# EAGLE board MS5803-14BA_Breakout-Panel-v10 (EAGLE 6.6.0), part 1 of 3
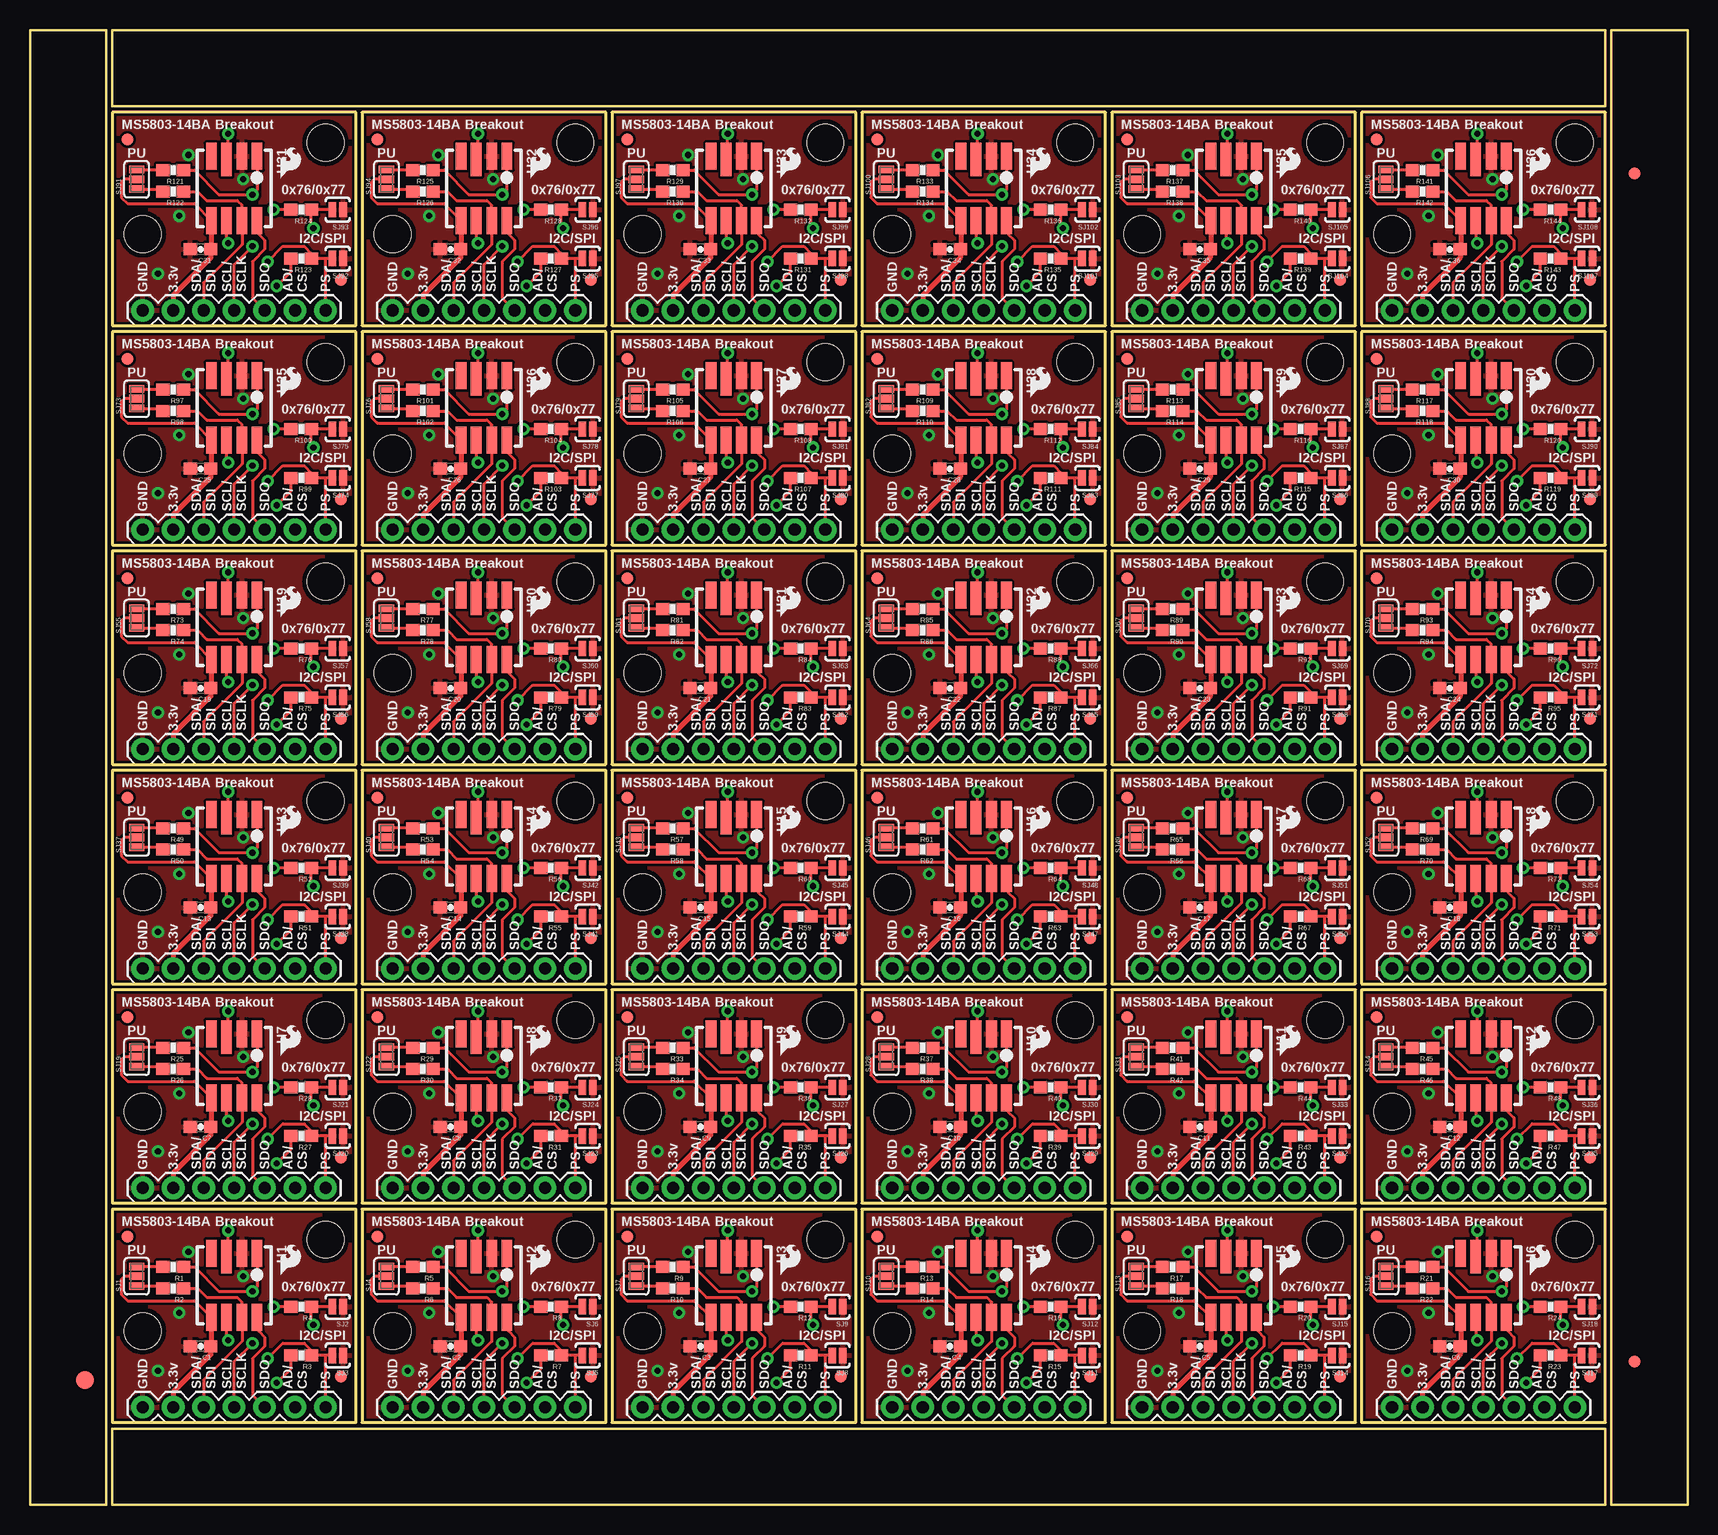
[diagram p0: board, top side]
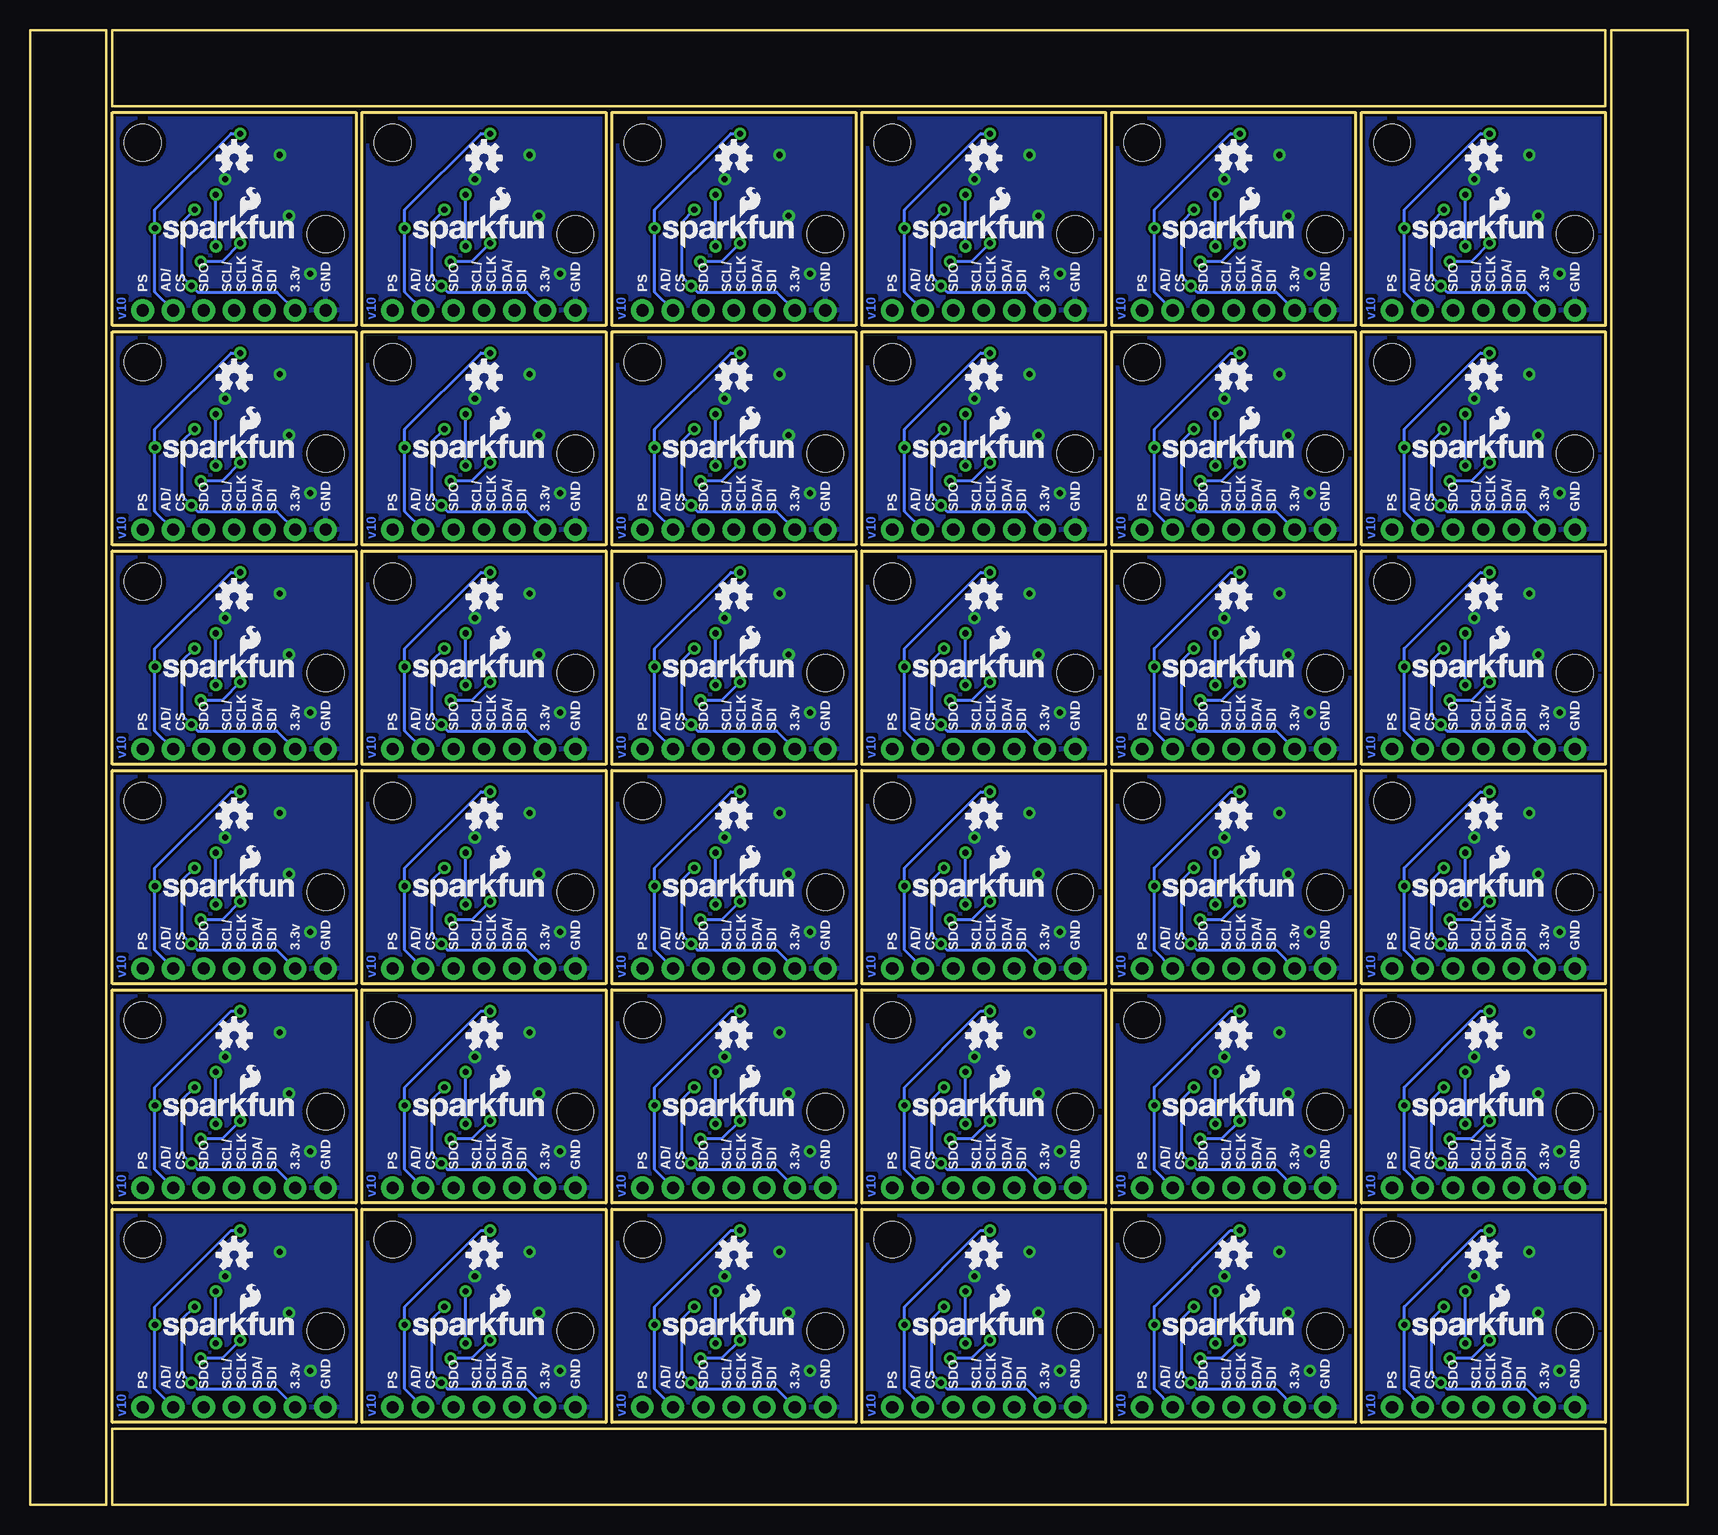
[diagram p1: board, bottom side, seen from below]

Size 138.18 x 122.94 mm. Coordinates in mm from the lower left corner, seen from the top.
Outline: 6.86,6.86 27.18,6.86 27.18,24.64 6.86,24.64 6.86,6.86
Outline: 27.69,6.86 48.01,6.86 48.01,24.64 27.69,24.64 27.69,6.86
Outline: 48.51,6.86 68.83,6.86 68.83,24.64 48.51,24.64 48.51,6.86
Outline: 69.34,6.86 89.66,6.86 89.66,24.64 69.34,24.64 69.34,6.86
Outline: 90.17,6.86 110.49,6.86 110.49,24.64 90.17,24.64 90.17,6.86
Outline: 111,6.86 131.32,6.86 131.32,24.64 111,24.64 111,6.86
Outline: 6.86,25.15 27.18,25.15 27.18,42.93 6.86,42.93 6.86,25.15
Outline: 27.69,25.15 48.01,25.15 48.01,42.93 27.69,42.93 27.69,25.15
Outline: 48.51,25.15 68.83,25.15 68.83,42.93 48.51,42.93 48.51,25.15
Outline: 69.34,25.15 89.66,25.15 89.66,42.93 69.34,42.93 69.34,25.15
Outline: 90.17,25.15 110.49,25.15 110.49,42.93 90.17,42.93 90.17,25.15
Outline: 111,25.15 131.32,25.15 131.32,42.93 111,42.93 111,25.15
Outline: 6.86,43.43 27.18,43.43 27.18,61.21 6.86,61.21 6.86,43.43
Outline: 27.69,43.43 48.01,43.43 48.01,61.21 27.69,61.21 27.69,43.43
Outline: 48.51,43.43 68.83,43.43 68.83,61.21 48.51,61.21 48.51,43.43
Outline: 69.34,43.43 89.66,43.43 89.66,61.21 69.34,61.21 69.34,43.43
Outline: 90.17,43.43 110.49,43.43 110.49,61.21 90.17,61.21 90.17,43.43
Outline: 111,43.43 131.32,43.43 131.32,61.21 111,61.21 111,43.43
Outline: 6.86,61.72 27.18,61.72 27.18,79.5 6.86,79.5 6.86,61.72
Outline: 27.69,61.72 48.01,61.72 48.01,79.5 27.69,79.5 27.69,61.72
Outline: 48.51,61.72 68.83,61.72 68.83,79.5 48.51,79.5 48.51,61.72
Outline: 69.34,61.72 89.66,61.72 89.66,79.5 69.34,79.5 69.34,61.72
Outline: 90.17,61.72 110.49,61.72 110.49,79.5 90.17,79.5 90.17,61.72
Outline: 111,61.72 131.32,61.72 131.32,79.5 111,79.5 111,61.72
Outline: 6.86,80.01 27.18,80.01 27.18,97.79 6.86,97.79 6.86,80.01
Outline: 27.69,80.01 48.01,80.01 48.01,97.79 27.69,97.79 27.69,80.01
Outline: 48.51,80.01 68.83,80.01 68.83,97.79 48.51,97.79 48.51,80.01
Outline: 69.34,80.01 89.66,80.01 89.66,97.79 69.34,97.79 69.34,80.01
Outline: 90.17,80.01 110.49,80.01 110.49,97.79 90.17,97.79 90.17,80.01
Outline: 111,80.01 131.32,80.01 131.32,97.79 111,97.79 111,80.01
Outline: 6.86,98.3 27.18,98.3 27.18,116.08 6.86,116.08 6.86,98.3
Outline: 27.69,98.3 48.01,98.3 48.01,116.08 27.69,116.08 27.69,98.3
Outline: 48.51,98.3 68.83,98.3 68.83,116.08 48.51,116.08 48.51,98.3
Outline: 69.34,98.3 89.66,98.3 89.66,116.08 69.34,116.08 69.34,98.3
Outline: 90.17,98.3 110.49,98.3 110.49,116.08 90.17,116.08 90.17,98.3
Outline: 111,98.3 131.32,98.3 131.32,116.08 111,116.08 111,98.3
Outline: 6.35,0 6.35,122.94 0,122.94 0,0 6.35,0
Outline: 6.86,0 131.32,0 131.32,6.35 6.86,6.35 6.86,0
Outline: 138.18,0 138.18,122.94 131.83,122.94 131.83,0 138.18,0
Outline: 131.32,122.94 6.86,122.94 6.86,116.59 131.32,116.59 131.32,122.94
Copper layers (1*16): Top 0.035mm / dielectric 1.5mm / Bottom 0.035mm
Design rules "SparkFun-2-layer": minimum track width 7mil, minimum drill 15mil, track to track 8mil, track to pad 8mil, pad to pad 8mil, via to via 8mil, smd to smd 8mil, copper to edge 8mil, drill to drill 8mil, minimum pad ring 12mil, minimum via ring 10mil, stop-mask expansion 4mil, vias tented up to drill 20mil, thermal gap 10mil

## Footprints (pad centres in the part's own frame; a part is rotated, then mirrored left to right if it is on the bottom)
0603-CAP = smd 1.1 x 1: 1 -0.85,0; 2 0.85,0
FIDUCIAL-1.5X3 = smd 1.5 x 1.5: 1 0,0
FIDUCIAL-1X2 = smd 1 x 1: 1 0,0
1X07 = drill 1.016 pad 1.88: 1 0,0; 2 2.54,0; 3 5.08,0; 4 7.62,0; 5 10.16,0; 6 12.7,0; 7 15.24,0
0603-RES = smd 1.1 x 1: 1 -0.85,0; 2 0.85,0
PAD-JUMPER-3-NC_BY_PASTE_YES_SILK_FULL_BOX = smd 0.635 x 1.27: 1 -0.813,0; 2 0,0; 3 0.813,0
SJ_2S-NO = smd 0.635 x 1.27: 1 -0.45,0; 2 0.45,0
STAND-OFF-TIGHT = hole 3.048: 0,0
MS5803 = smd 2.25 x 0.9: 1 -2.675,1.9; 2 -2.675,0.65; 4 -2.675,-1.9; 5 2.675,-1.9; 6 2.675,-0.65; 7 2.675,0.65; 8 2.675,1.9 | smd 2.8 x 0.9: 3 -2.4,-0.65

## Placement (x,y rotation side)
C1  0.1uF  [0603-CAP]  14.22,13.21 180 top
C2  0.1uF  [0603-CAP]  35.05,13.21 180 top
C3  0.1uF  [0603-CAP]  55.88,13.21 180 top
C4  0.1uF  [0603-CAP]  76.71,13.21 180 top
C5  0.1uF  [0603-CAP]  97.54,13.21 180 top
C6  0.1uF  [0603-CAP]  118.36,13.21 180 top
C7  0.1uF  [0603-CAP]  14.22,31.5 180 top
C8  0.1uF  [0603-CAP]  35.05,31.5 180 top
C9  0.1uF  [0603-CAP]  55.88,31.5 180 top
C10  0.1uF  [0603-CAP]  76.71,31.5 180 top
C11  0.1uF  [0603-CAP]  97.54,31.5 180 top
C12  0.1uF  [0603-CAP]  118.36,31.5 180 top
C13  0.1uF  [0603-CAP]  14.22,49.78 180 top
C14  0.1uF  [0603-CAP]  35.05,49.78 180 top
C15  0.1uF  [0603-CAP]  55.88,49.78 180 top
C16  0.1uF  [0603-CAP]  76.71,49.78 180 top
C17  0.1uF  [0603-CAP]  97.54,49.78 180 top
C18  0.1uF  [0603-CAP]  118.36,49.78 180 top
C19  0.1uF  [0603-CAP]  14.22,68.07 180 top
C20  0.1uF  [0603-CAP]  35.05,68.07 180 top
C21  0.1uF  [0603-CAP]  55.88,68.07 180 top
C22  0.1uF  [0603-CAP]  76.71,68.07 180 top
C23  0.1uF  [0603-CAP]  97.54,68.07 180 top
C24  0.1uF  [0603-CAP]  118.36,68.07 180 top
C25  0.1uF  [0603-CAP]  14.22,86.36 180 top
C26  0.1uF  [0603-CAP]  35.05,86.36 180 top
C27  0.1uF  [0603-CAP]  55.88,86.36 180 top
C28  0.1uF  [0603-CAP]  76.71,86.36 180 top
C29  0.1uF  [0603-CAP]  97.54,86.36 180 top
C30  0.1uF  [0603-CAP]  118.36,86.36 180 top
C31  0.1uF  [0603-CAP]  14.22,104.65 180 top
C32  0.1uF  [0603-CAP]  35.05,104.65 180 top
C33  0.1uF  [0603-CAP]  55.88,104.65 180 top
C34  0.1uF  [0603-CAP]  76.71,104.65 180 top
C35  0.1uF  [0603-CAP]  97.54,104.65 180 top
C36  0.1uF  [0603-CAP]  118.36,104.65 180 top
E$1  [FIDUCIAL-1.5X3]  4.57,10.41 0 top
E$4  [FIDUCIAL-1X2]  133.73,11.94 0 top
E$6  [FIDUCIAL-1X2]  133.73,111 180 top
FID1  FIDUCIAL1X2  [FIDUCIAL-1X2]  25.91,10.67 0 top
FID2  FIDUCIAL1X2  [FIDUCIAL-1X2]  8.13,22.35 0 top
FID3  FIDUCIAL1X2  [FIDUCIAL-1X2]  46.74,10.67 0 top
FID4  FIDUCIAL1X2  [FIDUCIAL-1X2]  28.96,22.35 0 top
FID5  FIDUCIAL1X2  [FIDUCIAL-1X2]  67.56,10.67 0 top
FID6  FIDUCIAL1X2  [FIDUCIAL-1X2]  49.78,22.35 0 top
FID7  FIDUCIAL1X2  [FIDUCIAL-1X2]  88.39,10.67 0 top
FID8  FIDUCIAL1X2  [FIDUCIAL-1X2]  70.61,22.35 0 top
FID9  FIDUCIAL1X2  [FIDUCIAL-1X2]  109.22,10.67 0 top
FID10  FIDUCIAL1X2  [FIDUCIAL-1X2]  91.44,22.35 0 top
FID11  FIDUCIAL1X2  [FIDUCIAL-1X2]  130.05,10.67 0 top
FID12  FIDUCIAL1X2  [FIDUCIAL-1X2]  112.27,22.35 0 top
FID13  FIDUCIAL1X2  [FIDUCIAL-1X2]  25.91,28.96 0 top
FID14  FIDUCIAL1X2  [FIDUCIAL-1X2]  8.13,40.64 0 top
FID15  FIDUCIAL1X2  [FIDUCIAL-1X2]  46.74,28.96 0 top
FID16  FIDUCIAL1X2  [FIDUCIAL-1X2]  28.96,40.64 0 top
FID17  FIDUCIAL1X2  [FIDUCIAL-1X2]  67.56,28.96 0 top
FID18  FIDUCIAL1X2  [FIDUCIAL-1X2]  49.78,40.64 0 top
FID19  FIDUCIAL1X2  [FIDUCIAL-1X2]  88.39,28.96 0 top
FID20  FIDUCIAL1X2  [FIDUCIAL-1X2]  70.61,40.64 0 top
FID21  FIDUCIAL1X2  [FIDUCIAL-1X2]  109.22,28.96 0 top
FID22  FIDUCIAL1X2  [FIDUCIAL-1X2]  91.44,40.64 0 top
FID23  FIDUCIAL1X2  [FIDUCIAL-1X2]  130.05,28.96 0 top
FID24  FIDUCIAL1X2  [FIDUCIAL-1X2]  112.27,40.64 0 top
FID25  FIDUCIAL1X2  [FIDUCIAL-1X2]  25.91,47.24 0 top
FID26  FIDUCIAL1X2  [FIDUCIAL-1X2]  8.13,58.93 0 top
FID27  FIDUCIAL1X2  [FIDUCIAL-1X2]  46.74,47.24 0 top
FID28  FIDUCIAL1X2  [FIDUCIAL-1X2]  28.96,58.93 0 top
FID29  FIDUCIAL1X2  [FIDUCIAL-1X2]  67.56,47.24 0 top
FID30  FIDUCIAL1X2  [FIDUCIAL-1X2]  49.78,58.93 0 top
FID31  FIDUCIAL1X2  [FIDUCIAL-1X2]  88.39,47.24 0 top
FID32  FIDUCIAL1X2  [FIDUCIAL-1X2]  70.61,58.93 0 top
FID33  FIDUCIAL1X2  [FIDUCIAL-1X2]  109.22,47.24 0 top
FID34  FIDUCIAL1X2  [FIDUCIAL-1X2]  91.44,58.93 0 top
FID35  FIDUCIAL1X2  [FIDUCIAL-1X2]  130.05,47.24 0 top
FID36  FIDUCIAL1X2  [FIDUCIAL-1X2]  112.27,58.93 0 top
FID37  FIDUCIAL1X2  [FIDUCIAL-1X2]  25.91,65.53 0 top
FID38  FIDUCIAL1X2  [FIDUCIAL-1X2]  8.13,77.22 0 top
FID39  FIDUCIAL1X2  [FIDUCIAL-1X2]  46.74,65.53 0 top
FID40  FIDUCIAL1X2  [FIDUCIAL-1X2]  28.96,77.22 0 top
FID41  FIDUCIAL1X2  [FIDUCIAL-1X2]  67.56,65.53 0 top
FID42  FIDUCIAL1X2  [FIDUCIAL-1X2]  49.78,77.22 0 top
FID43  FIDUCIAL1X2  [FIDUCIAL-1X2]  88.39,65.53 0 top
FID44  FIDUCIAL1X2  [FIDUCIAL-1X2]  70.61,77.22 0 top
FID45  FIDUCIAL1X2  [FIDUCIAL-1X2]  109.22,65.53 0 top
FID46  FIDUCIAL1X2  [FIDUCIAL-1X2]  91.44,77.22 0 top
FID47  FIDUCIAL1X2  [FIDUCIAL-1X2]  130.05,65.53 0 top
FID48  FIDUCIAL1X2  [FIDUCIAL-1X2]  112.27,77.22 0 top
FID49  FIDUCIAL1X2  [FIDUCIAL-1X2]  25.91,83.82 0 top
FID50  FIDUCIAL1X2  [FIDUCIAL-1X2]  8.13,95.5 0 top
FID51  FIDUCIAL1X2  [FIDUCIAL-1X2]  46.74,83.82 0 top
FID52  FIDUCIAL1X2  [FIDUCIAL-1X2]  28.96,95.5 0 top
FID53  FIDUCIAL1X2  [FIDUCIAL-1X2]  67.56,83.82 0 top
FID54  FIDUCIAL1X2  [FIDUCIAL-1X2]  49.78,95.5 0 top
FID55  FIDUCIAL1X2  [FIDUCIAL-1X2]  88.39,83.82 0 top
FID56  FIDUCIAL1X2  [FIDUCIAL-1X2]  70.61,95.5 0 top
FID57  FIDUCIAL1X2  [FIDUCIAL-1X2]  109.22,83.82 0 top
FID58  FIDUCIAL1X2  [FIDUCIAL-1X2]  91.44,95.5 0 top
FID59  FIDUCIAL1X2  [FIDUCIAL-1X2]  130.05,83.82 0 top
FID60  FIDUCIAL1X2  [FIDUCIAL-1X2]  112.27,95.5 0 top
FID61  FIDUCIAL1X2  [FIDUCIAL-1X2]  25.91,102.11 0 top
FID62  FIDUCIAL1X2  [FIDUCIAL-1X2]  8.13,113.79 0 top
FID63  FIDUCIAL1X2  [FIDUCIAL-1X2]  46.74,102.11 0 top
FID64  FIDUCIAL1X2  [FIDUCIAL-1X2]  28.96,113.79 0 top
FID65  FIDUCIAL1X2  [FIDUCIAL-1X2]  67.56,102.11 0 top
FID66  FIDUCIAL1X2  [FIDUCIAL-1X2]  49.78,113.79 0 top
FID67  FIDUCIAL1X2  [FIDUCIAL-1X2]  88.39,102.11 0 top
FID68  FIDUCIAL1X2  [FIDUCIAL-1X2]  70.61,113.79 0 top
FID69  FIDUCIAL1X2  [FIDUCIAL-1X2]  109.22,102.11 0 top
FID70  FIDUCIAL1X2  [FIDUCIAL-1X2]  91.44,113.79 0 top
FID71  FIDUCIAL1X2  [FIDUCIAL-1X2]  130.05,102.11 0 top
FID72  FIDUCIAL1X2  [FIDUCIAL-1X2]  112.27,113.79 0 top
JP1  [1X07]  9.4,8.13 0 top
JP2  [1X07]  30.23,8.13 0 top
JP3  [1X07]  51.05,8.13 0 top
JP4  [1X07]  71.88,8.13 0 top
JP5  [1X07]  92.71,8.13 0 top
JP6  [1X07]  113.54,8.13 0 top
JP7  [1X07]  9.4,26.42 0 top
JP8  [1X07]  30.23,26.42 0 top
JP9  [1X07]  51.05,26.42 0 top
JP10  [1X07]  71.88,26.42 0 top
JP11  [1X07]  92.71,26.42 0 top
JP12  [1X07]  113.54,26.42 0 top
JP13  [1X07]  9.4,44.7 0 top
JP14  [1X07]  30.23,44.7 0 top
JP15  [1X07]  51.05,44.7 0 top
JP16  [1X07]  71.88,44.7 0 top
JP17  [1X07]  92.71,44.7 0 top
JP18  [1X07]  113.54,44.7 0 top
JP19  [1X07]  9.4,62.99 0 top
JP20  [1X07]  30.23,62.99 0 top
JP21  [1X07]  51.05,62.99 0 top
JP22  [1X07]  71.88,62.99 0 top
JP23  [1X07]  92.71,62.99 0 top
JP24  [1X07]  113.54,62.99 0 top
JP25  [1X07]  9.4,81.28 0 top
JP26  [1X07]  30.23,81.28 0 top
JP27  [1X07]  51.05,81.28 0 top
JP28  [1X07]  71.88,81.28 0 top
JP29  [1X07]  92.71,81.28 0 top
JP30  [1X07]  113.54,81.28 0 top
JP31  [1X07]  9.4,99.57 0 top
JP32  [1X07]  30.23,99.57 0 top
JP33  [1X07]  51.05,99.57 0 top
JP34  [1X07]  71.88,99.57 0 top
JP35  [1X07]  92.71,99.57 0 top
JP36  [1X07]  113.54,99.57 0 top
LOGO1  SFE_LOGO_FLAME.1_INCH  [SFE_LOGO_FLAME_.1]  20.57,18.8 0 top
LOGO2  SFE_LOGO_NAME_FLAME.1_INCH  [SFE_LOGO_NAME_FLAME_.1]  23.37,13.21 0 bottom
LOGO3  OSHW-LOGOS  [OSHW-LOGO-S]  17.02,20.83 0 bottom
LOGO4  SFE_LOGO_FLAME.1_INCH  [SFE_LOGO_FLAME_.1]  41.4,18.8 0 top
LOGO5  SFE_LOGO_NAME_FLAME.1_INCH  [SFE_LOGO_NAME_FLAME_.1]  44.2,13.21 0 bottom
LOGO6  OSHW-LOGOS  [OSHW-LOGO-S]  37.85,20.83 0 bottom
LOGO7  SFE_LOGO_FLAME.1_INCH  [SFE_LOGO_FLAME_.1]  62.23,18.8 0 top
LOGO8  SFE_LOGO_NAME_FLAME.1_INCH  [SFE_LOGO_NAME_FLAME_.1]  65.02,13.21 0 bottom
LOGO9  OSHW-LOGOS  [OSHW-LOGO-S]  58.67,20.83 0 bottom
LOGO10  SFE_LOGO_FLAME.1_INCH  [SFE_LOGO_FLAME_.1]  83.06,18.8 0 top
LOGO11  SFE_LOGO_NAME_FLAME.1_INCH  [SFE_LOGO_NAME_FLAME_.1]  85.85,13.21 0 bottom
LOGO12  OSHW-LOGOS  [OSHW-LOGO-S]  79.5,20.83 0 bottom
LOGO13  SFE_LOGO_FLAME.1_INCH  [SFE_LOGO_FLAME_.1]  103.89,18.8 0 top
LOGO14  SFE_LOGO_NAME_FLAME.1_INCH  [SFE_LOGO_NAME_FLAME_.1]  106.68,13.21 0 bottom
LOGO15  OSHW-LOGOS  [OSHW-LOGO-S]  100.33,20.83 0 bottom
LOGO16  SFE_LOGO_FLAME.1_INCH  [SFE_LOGO_FLAME_.1]  124.71,18.8 0 top
LOGO17  SFE_LOGO_NAME_FLAME.1_INCH  [SFE_LOGO_NAME_FLAME_.1]  127.51,13.21 0 bottom
LOGO18  OSHW-LOGOS  [OSHW-LOGO-S]  121.16,20.83 0 bottom
LOGO19  SFE_LOGO_FLAME.1_INCH  [SFE_LOGO_FLAME_.1]  20.57,37.08 0 top
LOGO20  SFE_LOGO_NAME_FLAME.1_INCH  [SFE_LOGO_NAME_FLAME_.1]  23.37,31.5 0 bottom
LOGO21  OSHW-LOGOS  [OSHW-LOGO-S]  17.02,39.12 0 bottom
LOGO22  SFE_LOGO_FLAME.1_INCH  [SFE_LOGO_FLAME_.1]  41.4,37.08 0 top
LOGO23  SFE_LOGO_NAME_FLAME.1_INCH  [SFE_LOGO_NAME_FLAME_.1]  44.2,31.5 0 bottom
LOGO24  OSHW-LOGOS  [OSHW-LOGO-S]  37.85,39.12 0 bottom
LOGO25  SFE_LOGO_FLAME.1_INCH  [SFE_LOGO_FLAME_.1]  62.23,37.08 0 top
LOGO26  SFE_LOGO_NAME_FLAME.1_INCH  [SFE_LOGO_NAME_FLAME_.1]  65.02,31.5 0 bottom
LOGO27  OSHW-LOGOS  [OSHW-LOGO-S]  58.67,39.12 0 bottom
LOGO28  SFE_LOGO_FLAME.1_INCH  [SFE_LOGO_FLAME_.1]  83.06,37.08 0 top
LOGO29  SFE_LOGO_NAME_FLAME.1_INCH  [SFE_LOGO_NAME_FLAME_.1]  85.85,31.5 0 bottom
LOGO30  OSHW-LOGOS  [OSHW-LOGO-S]  79.5,39.12 0 bottom
LOGO31  SFE_LOGO_FLAME.1_INCH  [SFE_LOGO_FLAME_.1]  103.89,37.08 0 top
LOGO32  SFE_LOGO_NAME_FLAME.1_INCH  [SFE_LOGO_NAME_FLAME_.1]  106.68,31.5 0 bottom
LOGO33  OSHW-LOGOS  [OSHW-LOGO-S]  100.33,39.12 0 bottom
LOGO34  SFE_LOGO_FLAME.1_INCH  [SFE_LOGO_FLAME_.1]  124.71,37.08 0 top
LOGO35  SFE_LOGO_NAME_FLAME.1_INCH  [SFE_LOGO_NAME_FLAME_.1]  127.51,31.5 0 bottom
LOGO36  OSHW-LOGOS  [OSHW-LOGO-S]  121.16,39.12 0 bottom
LOGO37  SFE_LOGO_FLAME.1_INCH  [SFE_LOGO_FLAME_.1]  20.57,55.37 0 top
LOGO38  SFE_LOGO_NAME_FLAME.1_INCH  [SFE_LOGO_NAME_FLAME_.1]  23.37,49.78 0 bottom
LOGO39  OSHW-LOGOS  [OSHW-LOGO-S]  17.02,57.4 0 bottom
LOGO40  SFE_LOGO_FLAME.1_INCH  [SFE_LOGO_FLAME_.1]  41.4,55.37 0 top
LOGO41  SFE_LOGO_NAME_FLAME.1_INCH  [SFE_LOGO_NAME_FLAME_.1]  44.2,49.78 0 bottom
LOGO42  OSHW-LOGOS  [OSHW-LOGO-S]  37.85,57.4 0 bottom
LOGO43  SFE_LOGO_FLAME.1_INCH  [SFE_LOGO_FLAME_.1]  62.23,55.37 0 top
LOGO44  SFE_LOGO_NAME_FLAME.1_INCH  [SFE_LOGO_NAME_FLAME_.1]  65.02,49.78 0 bottom
LOGO45  OSHW-LOGOS  [OSHW-LOGO-S]  58.67,57.4 0 bottom
LOGO46  SFE_LOGO_FLAME.1_INCH  [SFE_LOGO_FLAME_.1]  83.06,55.37 0 top
LOGO47  SFE_LOGO_NAME_FLAME.1_INCH  [SFE_LOGO_NAME_FLAME_.1]  85.85,49.78 0 bottom
LOGO48  OSHW-LOGOS  [OSHW-LOGO-S]  79.5,57.4 0 bottom
LOGO49  SFE_LOGO_FLAME.1_INCH  [SFE_LOGO_FLAME_.1]  103.89,55.37 0 top
LOGO50  SFE_LOGO_NAME_FLAME.1_INCH  [SFE_LOGO_NAME_FLAME_.1]  106.68,49.78 0 bottom
LOGO51  OSHW-LOGOS  [OSHW-LOGO-S]  100.33,57.4 0 bottom
LOGO52  SFE_LOGO_FLAME.1_INCH  [SFE_LOGO_FLAME_.1]  124.71,55.37 0 top
LOGO53  SFE_LOGO_NAME_FLAME.1_INCH  [SFE_LOGO_NAME_FLAME_.1]  127.51,49.78 0 bottom
LOGO54  OSHW-LOGOS  [OSHW-LOGO-S]  121.16,57.4 0 bottom
LOGO55  SFE_LOGO_FLAME.1_INCH  [SFE_LOGO_FLAME_.1]  20.57,73.66 0 top
LOGO56  SFE_LOGO_NAME_FLAME.1_INCH  [SFE_LOGO_NAME_FLAME_.1]  23.37,68.07 0 bottom
LOGO57  OSHW-LOGOS  [OSHW-LOGO-S]  17.02,75.69 0 bottom
LOGO58  SFE_LOGO_FLAME.1_INCH  [SFE_LOGO_FLAME_.1]  41.4,73.66 0 top
LOGO59  SFE_LOGO_NAME_FLAME.1_INCH  [SFE_LOGO_NAME_FLAME_.1]  44.2,68.07 0 bottom
LOGO60  OSHW-LOGOS  [OSHW-LOGO-S]  37.85,75.69 0 bottom
LOGO61  SFE_LOGO_FLAME.1_INCH  [SFE_LOGO_FLAME_.1]  62.23,73.66 0 top
LOGO62  SFE_LOGO_NAME_FLAME.1_INCH  [SFE_LOGO_NAME_FLAME_.1]  65.02,68.07 0 bottom
LOGO63  OSHW-LOGOS  [OSHW-LOGO-S]  58.67,75.69 0 bottom
LOGO64  SFE_LOGO_FLAME.1_INCH  [SFE_LOGO_FLAME_.1]  83.06,73.66 0 top
LOGO65  SFE_LOGO_NAME_FLAME.1_INCH  [SFE_LOGO_NAME_FLAME_.1]  85.85,68.07 0 bottom
LOGO66  OSHW-LOGOS  [OSHW-LOGO-S]  79.5,75.69 0 bottom
LOGO67  SFE_LOGO_FLAME.1_INCH  [SFE_LOGO_FLAME_.1]  103.89,73.66 0 top
LOGO68  SFE_LOGO_NAME_FLAME.1_INCH  [SFE_LOGO_NAME_FLAME_.1]  106.68,68.07 0 bottom
LOGO69  OSHW-LOGOS  [OSHW-LOGO-S]  100.33,75.69 0 bottom
LOGO70  SFE_LOGO_FLAME.1_INCH  [SFE_LOGO_FLAME_.1]  124.71,73.66 0 top
LOGO71  SFE_LOGO_NAME_FLAME.1_INCH  [SFE_LOGO_NAME_FLAME_.1]  127.51,68.07 0 bottom
LOGO72  OSHW-LOGOS  [OSHW-LOGO-S]  121.16,75.69 0 bottom
LOGO73  SFE_LOGO_FLAME.1_INCH  [SFE_LOGO_FLAME_.1]  20.57,91.95 0 top
LOGO74  SFE_LOGO_NAME_FLAME.1_INCH  [SFE_LOGO_NAME_FLAME_.1]  23.37,86.36 0 bottom
LOGO75  OSHW-LOGOS  [OSHW-LOGO-S]  17.02,93.98 0 bottom
LOGO76  SFE_LOGO_FLAME.1_INCH  [SFE_LOGO_FLAME_.1]  41.4,91.95 0 top
LOGO77  SFE_LOGO_NAME_FLAME.1_INCH  [SFE_LOGO_NAME_FLAME_.1]  44.2,86.36 0 bottom
LOGO78  OSHW-LOGOS  [OSHW-LOGO-S]  37.85,93.98 0 bottom
LOGO79  SFE_LOGO_FLAME.1_INCH  [SFE_LOGO_FLAME_.1]  62.23,91.95 0 top
LOGO80  SFE_LOGO_NAME_FLAME.1_INCH  [SFE_LOGO_NAME_FLAME_.1]  65.02,86.36 0 bottom
LOGO81  OSHW-LOGOS  [OSHW-LOGO-S]  58.67,93.98 0 bottom
LOGO82  SFE_LOGO_FLAME.1_INCH  [SFE_LOGO_FLAME_.1]  83.06,91.95 0 top
LOGO83  SFE_LOGO_NAME_FLAME.1_INCH  [SFE_LOGO_NAME_FLAME_.1]  85.85,86.36 0 bottom
LOGO84  OSHW-LOGOS  [OSHW-LOGO-S]  79.5,93.98 0 bottom
LOGO85  SFE_LOGO_FLAME.1_INCH  [SFE_LOGO_FLAME_.1]  103.89,91.95 0 top
LOGO86  SFE_LOGO_NAME_FLAME.1_INCH  [SFE_LOGO_NAME_FLAME_.1]  106.68,86.36 0 bottom
LOGO87  OSHW-LOGOS  [OSHW-LOGO-S]  100.33,93.98 0 bottom
LOGO88  SFE_LOGO_FLAME.1_INCH  [SFE_LOGO_FLAME_.1]  124.71,91.95 0 top
LOGO89  SFE_LOGO_NAME_FLAME.1_INCH  [SFE_LOGO_NAME_FLAME_.1]  127.51,86.36 0 bottom
LOGO90  OSHW-LOGOS  [OSHW-LOGO-S]  121.16,93.98 0 bottom
LOGO91  SFE_LOGO_FLAME.1_INCH  [SFE_LOGO_FLAME_.1]  20.57,110.24 0 top
LOGO92  SFE_LOGO_NAME_FLAME.1_INCH  [SFE_LOGO_NAME_FLAME_.1]  23.37,104.65 0 bottom
LOGO93  OSHW-LOGOS  [OSHW-LOGO-S]  17.02,112.27 0 bottom
LOGO94  SFE_LOGO_FLAME.1_INCH  [SFE_LOGO_FLAME_.1]  41.4,110.24 0 top
LOGO95  SFE_LOGO_NAME_FLAME.1_INCH  [SFE_LOGO_NAME_FLAME_.1]  44.2,104.65 0 bottom
LOGO96  OSHW-LOGOS  [OSHW-LOGO-S]  37.85,112.27 0 bottom
LOGO97  SFE_LOGO_FLAME.1_INCH  [SFE_LOGO_FLAME_.1]  62.23,110.24 0 top
LOGO98  SFE_LOGO_NAME_FLAME.1_INCH  [SFE_LOGO_NAME_FLAME_.1]  65.02,104.65 0 bottom
LOGO99  OSHW-LOGOS  [OSHW-LOGO-S]  58.67,112.27 0 bottom
LOGO100  SFE_LOGO_FLAME.1_INCH  [SFE_LOGO_FLAME_.1]  83.06,110.24 0 top
LOGO101  SFE_LOGO_NAME_FLAME.1_INCH  [SFE_LOGO_NAME_FLAME_.1]  85.85,104.65 0 bottom
LOGO102  OSHW-LOGOS  [OSHW-LOGO-S]  79.5,112.27 0 bottom
LOGO103  SFE_LOGO_FLAME.1_INCH  [SFE_LOGO_FLAME_.1]  103.89,110.24 0 top
LOGO104  SFE_LOGO_NAME_FLAME.1_INCH  [SFE_LOGO_NAME_FLAME_.1]  106.68,104.65 0 bottom
LOGO105  OSHW-LOGOS  [OSHW-LOGO-S]  100.33,112.27 0 bottom
LOGO106  SFE_LOGO_FLAME.1_INCH  [SFE_LOGO_FLAME_.1]  124.71,110.24 0 top
LOGO107  SFE_LOGO_NAME_FLAME.1_INCH  [SFE_LOGO_NAME_FLAME_.1]  127.51,104.65 0 bottom
LOGO108  OSHW-LOGOS  [OSHW-LOGO-S]  121.16,112.27 0 bottom
R1  2.2k  [0603-RES]  11.94,19.81 180 top
R2  2.2k  [0603-RES]  11.94,18.03 180 top
R3  10K  [0603-RES]  22.61,12.45 180 top
R4  10K  [0603-RES]  22.61,16.51 180 top
R5  2.2k  [0603-RES]  32.77,19.81 180 top
R6  2.2k  [0603-RES]  32.77,18.03 180 top
R7  10K  [0603-RES]  43.43,12.45 180 top
R8  10K  [0603-RES]  43.43,16.51 180 top
R9  2.2k  [0603-RES]  53.59,19.81 180 top
R10  2.2k  [0603-RES]  53.59,18.03 180 top
R11  10K  [0603-RES]  64.26,12.45 180 top
R12  10K  [0603-RES]  64.26,16.51 180 top
R13  2.2k  [0603-RES]  74.42,19.81 180 top
R14  2.2k  [0603-RES]  74.42,18.03 180 top
R15  10K  [0603-RES]  85.09,12.45 180 top
R16  10K  [0603-RES]  85.09,16.51 180 top
R17  2.2k  [0603-RES]  95.25,19.81 180 top
R18  2.2k  [0603-RES]  95.25,18.03 180 top
R19  10K  [0603-RES]  105.92,12.45 180 top
R20  10K  [0603-RES]  105.92,16.51 180 top
R21  2.2k  [0603-RES]  116.08,19.81 180 top
R22  2.2k  [0603-RES]  116.08,18.03 180 top
R23  10K  [0603-RES]  126.75,12.45 180 top
R24  10K  [0603-RES]  126.75,16.51 180 top
R25  2.2k  [0603-RES]  11.94,38.1 180 top
R26  2.2k  [0603-RES]  11.94,36.32 180 top
R27  10K  [0603-RES]  22.61,30.73 180 top
R28  10K  [0603-RES]  22.61,34.8 180 top
R29  2.2k  [0603-RES]  32.77,38.1 180 top
R30  2.2k  [0603-RES]  32.77,36.32 180 top
R31  10K  [0603-RES]  43.43,30.73 180 top
R32  10K  [0603-RES]  43.43,34.8 180 top
R33  2.2k  [0603-RES]  53.59,38.1 180 top
R34  2.2k  [0603-RES]  53.59,36.32 180 top
R35  10K  [0603-RES]  64.26,30.73 180 top
R36  10K  [0603-RES]  64.26,34.8 180 top
R37  2.2k  [0603-RES]  74.42,38.1 180 top
R38  2.2k  [0603-RES]  74.42,36.32 180 top
R39  10K  [0603-RES]  85.09,30.73 180 top
R40  10K  [0603-RES]  85.09,34.8 180 top
R41  2.2k  [0603-RES]  95.25,38.1 180 top
R42  2.2k  [0603-RES]  95.25,36.32 180 top
R43  10K  [0603-RES]  105.92,30.73 180 top
R44  10K  [0603-RES]  105.92,34.8 180 top
R45  2.2k  [0603-RES]  116.08,38.1 180 top
R46  2.2k  [0603-RES]  116.08,36.32 180 top
R47  10K  [0603-RES]  126.75,30.73 180 top
R48  10K  [0603-RES]  126.75,34.8 180 top
R49  2.2k  [0603-RES]  11.94,56.39 180 top
R50  2.2k  [0603-RES]  11.94,54.61 180 top
R51  10K  [0603-RES]  22.61,49.02 180 top
R52  10K  [0603-RES]  22.61,53.09 180 top
R53  2.2k  [0603-RES]  32.77,56.39 180 top
R54  2.2k  [0603-RES]  32.77,54.61 180 top
R55  10K  [0603-RES]  43.43,49.02 180 top
R56  10K  [0603-RES]  43.43,53.09 180 top
R57  2.2k  [0603-RES]  53.59,56.39 180 top
R58  2.2k  [0603-RES]  53.59,54.61 180 top
R59  10K  [0603-RES]  64.26,49.02 180 top
R60  10K  [0603-RES]  64.26,53.09 180 top
R61  2.2k  [0603-RES]  74.42,56.39 180 top
R62  2.2k  [0603-RES]  74.42,54.61 180 top
R63  10K  [0603-RES]  85.09,49.02 180 top
R64  10K  [0603-RES]  85.09,53.09 180 top
R65  2.2k  [0603-RES]  95.25,56.39 180 top
R66  2.2k  [0603-RES]  95.25,54.61 180 top
R67  10K  [0603-RES]  105.92,49.02 180 top
R68  10K  [0603-RES]  105.92,53.09 180 top
R69  2.2k  [0603-RES]  116.08,56.39 180 top
R70  2.2k  [0603-RES]  116.08,54.61 180 top
R71  10K  [0603-RES]  126.75,49.02 180 top
R72  10K  [0603-RES]  126.75,53.09 180 top
R73  2.2k  [0603-RES]  11.94,74.68 180 top
R74  2.2k  [0603-RES]  11.94,72.9 180 top
R75  10K  [0603-RES]  22.61,67.31 180 top
R76  10K  [0603-RES]  22.61,71.37 180 top
R77  2.2k  [0603-RES]  32.77,74.68 180 top
R78  2.2k  [0603-RES]  32.77,72.9 180 top
R79  10K  [0603-RES]  43.43,67.31 180 top
R80  10K  [0603-RES]  43.43,71.37 180 top
R81  2.2k  [0603-RES]  53.59,74.68 180 top
R82  2.2k  [0603-RES]  53.59,72.9 180 top
R83  10K  [0603-RES]  64.26,67.31 180 top
R84  10K  [0603-RES]  64.26,71.37 180 top
R85  2.2k  [0603-RES]  74.42,74.68 180 top
R86  2.2k  [0603-RES]  74.42,72.9 180 top
R87  10K  [0603-RES]  85.09,67.31 180 top
R88  10K  [0603-RES]  85.09,71.37 180 top
R89  2.2k  [0603-RES]  95.25,74.68 180 top
R90  2.2k  [0603-RES]  95.25,72.9 180 top
R91  10K  [0603-RES]  105.92,67.31 180 top
R92  10K  [0603-RES]  105.92,71.37 180 top
R93  2.2k  [0603-RES]  116.08,74.68 180 top
R94  2.2k  [0603-RES]  116.08,72.9 180 top
R95  10K  [0603-RES]  126.75,67.31 180 top
R96  10K  [0603-RES]  126.75,71.37 180 top
R97  2.2k  [0603-RES]  11.94,92.96 180 top
R98  2.2k  [0603-RES]  11.94,91.19 180 top
R99  10K  [0603-RES]  22.61,85.6 180 top
R100  10K  [0603-RES]  22.61,89.66 180 top
R101  2.2k  [0603-RES]  32.77,92.96 180 top
R102  2.2k  [0603-RES]  32.77,91.19 180 top
R103  10K  [0603-RES]  43.43,85.6 180 top
R104  10K  [0603-RES]  43.43,89.66 180 top
R105  2.2k  [0603-RES]  53.59,92.96 180 top
R106  2.2k  [0603-RES]  53.59,91.19 180 top
R107  10K  [0603-RES]  64.26,85.6 180 top
R108  10K  [0603-RES]  64.26,89.66 180 top
R109  2.2k  [0603-RES]  74.42,92.96 180 top
R110  2.2k  [0603-RES]  74.42,91.19 180 top
R111  10K  [0603-RES]  85.09,85.6 180 top
R112  10K  [0603-RES]  85.09,89.66 180 top
R113  2.2k  [0603-RES]  95.25,92.96 180 top
R114  2.2k  [0603-RES]  95.25,91.19 180 top
R115  10K  [0603-RES]  105.92,85.6 180 top
R116  10K  [0603-RES]  105.92,89.66 180 top
R117  2.2k  [0603-RES]  116.08,92.96 180 top
R118  2.2k  [0603-RES]  116.08,91.19 180 top
R119  10K  [0603-RES]  126.75,85.6 180 top
R120  10K  [0603-RES]  126.75,89.66 180 top
R121  2.2k  [0603-RES]  11.94,111.25 180 top
R122  2.2k  [0603-RES]  11.94,109.47 180 top
R123  10K  [0603-RES]  22.61,103.89 180 top
R124  10K  [0603-RES]  22.61,107.95 180 top
R125  2.2k  [0603-RES]  32.77,111.25 180 top
R126  2.2k  [0603-RES]  32.77,109.47 180 top
R127  10K  [0603-RES]  43.43,103.89 180 top
R128  10K  [0603-RES]  43.43,107.95 180 top
R129  2.2k  [0603-RES]  53.59,111.25 180 top
R130  2.2k  [0603-RES]  53.59,109.47 180 top
R131  10K  [0603-RES]  64.26,103.89 180 top
R132  10K  [0603-RES]  64.26,107.95 180 top
R133  2.2k  [0603-RES]  74.42,111.25 180 top
R134  2.2k  [0603-RES]  74.42,109.47 180 top
R135  10K  [0603-RES]  85.09,103.89 180 top
R136  10K  [0603-RES]  85.09,107.95 180 top
R137  2.2k  [0603-RES]  95.25,111.25 180 top
R138  2.2k  [0603-RES]  95.25,109.47 180 top
R139  10K  [0603-RES]  105.92,103.89 180 top
R140  10K  [0603-RES]  105.92,107.95 180 top
R141  2.2k  [0603-RES]  116.08,111.25 180 top
R142  2.2k  [0603-RES]  116.08,109.47 180 top
R143  10K  [0603-RES]  126.75,103.89 180 top
R144  10K  [0603-RES]  126.75,107.95 180 top
SJ1  [PAD-JUMPER-3-NC_BY_PASTE_YES_SILK_FULL_BOX]  8.89,19.05 90 top
SJ2  SOLDERJUMPERNO  [SJ_2S-NO]  25.65,16.51 180 top
SJ3  SOLDERJUMPERNO  [SJ_2S-NO]  25.65,12.45 180 top
SJ4  [PAD-JUMPER-3-NC_BY_PASTE_YES_SILK_FULL_BOX]  29.72,19.05 90 top
SJ5  SOLDERJUMPERNO  [SJ_2S-NO]  46.48,12.45 180 top
SJ6  SOLDERJUMPERNO  [SJ_2S-NO]  46.48,16.51 180 top
SJ7  [PAD-JUMPER-3-NC_BY_PASTE_YES_SILK_FULL_BOX]  50.55,19.05 90 top
SJ8  SOLDERJUMPERNO  [SJ_2S-NO]  67.31,12.45 180 top
SJ9  SOLDERJUMPERNO  [SJ_2S-NO]  67.31,16.51 180 top
SJ10  [PAD-JUMPER-3-NC_BY_PASTE_YES_SILK_FULL_BOX]  71.37,19.05 90 top
SJ11  SOLDERJUMPERNO  [SJ_2S-NO]  88.14,12.45 180 top
SJ12  SOLDERJUMPERNO  [SJ_2S-NO]  88.14,16.51 180 top
SJ13  [PAD-JUMPER-3-NC_BY_PASTE_YES_SILK_FULL_BOX]  92.2,19.05 90 top
SJ14  SOLDERJUMPERNO  [SJ_2S-NO]  108.97,12.45 180 top
SJ15  SOLDERJUMPERNO  [SJ_2S-NO]  108.97,16.51 180 top
SJ16  [PAD-JUMPER-3-NC_BY_PASTE_YES_SILK_FULL_BOX]  113.03,19.05 90 top
SJ17  SOLDERJUMPERNO  [SJ_2S-NO]  129.79,12.45 180 top
SJ18  SOLDERJUMPERNO  [SJ_2S-NO]  129.79,16.51 180 top
SJ19  [PAD-JUMPER-3-NC_BY_PASTE_YES_SILK_FULL_BOX]  8.89,37.34 90 top
SJ20  SOLDERJUMPERNO  [SJ_2S-NO]  25.65,30.73 180 top
SJ21  SOLDERJUMPERNO  [SJ_2S-NO]  25.65,34.8 180 top
SJ22  [PAD-JUMPER-3-NC_BY_PASTE_YES_SILK_FULL_BOX]  29.72,37.34 90 top
SJ23  SOLDERJUMPERNO  [SJ_2S-NO]  46.48,30.73 180 top
SJ24  SOLDERJUMPERNO  [SJ_2S-NO]  46.48,34.8 180 top
SJ25  [PAD-JUMPER-3-NC_BY_PASTE_YES_SILK_FULL_BOX]  50.55,37.34 90 top
SJ26  SOLDERJUMPERNO  [SJ_2S-NO]  67.31,30.73 180 top
SJ27  SOLDERJUMPERNO  [SJ_2S-NO]  67.31,34.8 180 top
SJ28  [PAD-JUMPER-3-NC_BY_PASTE_YES_SILK_FULL_BOX]  71.37,37.34 90 top
SJ29  SOLDERJUMPERNO  [SJ_2S-NO]  88.14,30.73 180 top
SJ30  SOLDERJUMPERNO  [SJ_2S-NO]  88.14,34.8 180 top
SJ31  [PAD-JUMPER-3-NC_BY_PASTE_YES_SILK_FULL_BOX]  92.2,37.34 90 top
SJ32  SOLDERJUMPERNO  [SJ_2S-NO]  108.97,30.73 180 top
SJ33  SOLDERJUMPERNO  [SJ_2S-NO]  108.97,34.8 180 top
SJ34  [PAD-JUMPER-3-NC_BY_PASTE_YES_SILK_FULL_BOX]  113.03,37.34 90 top
SJ35  SOLDERJUMPERNO  [SJ_2S-NO]  129.79,30.73 180 top
SJ36  SOLDERJUMPERNO  [SJ_2S-NO]  129.79,34.8 180 top
SJ37  [PAD-JUMPER-3-NC_BY_PASTE_YES_SILK_FULL_BOX]  8.89,55.63 90 top
SJ38  SOLDERJUMPERNO  [SJ_2S-NO]  25.65,49.02 180 top
SJ39  SOLDERJUMPERNO  [SJ_2S-NO]  25.65,53.09 180 top
SJ40  [PAD-JUMPER-3-NC_BY_PASTE_YES_SILK_FULL_BOX]  29.72,55.63 90 top
SJ41  SOLDERJUMPERNO  [SJ_2S-NO]  46.48,49.02 180 top
SJ42  SOLDERJUMPERNO  [SJ_2S-NO]  46.48,53.09 180 top
SJ43  [PAD-JUMPER-3-NC_BY_PASTE_YES_SILK_FULL_BOX]  50.55,55.63 90 top
SJ44  SOLDERJUMPERNO  [SJ_2S-NO]  67.31,49.02 180 top
SJ45  SOLDERJUMPERNO  [SJ_2S-NO]  67.31,53.09 180 top
SJ46  [PAD-JUMPER-3-NC_BY_PASTE_YES_SILK_FULL_BOX]  71.37,55.63 90 top
SJ47  SOLDERJUMPERNO  [SJ_2S-NO]  88.14,49.02 180 top
SJ48  SOLDERJUMPERNO  [SJ_2S-NO]  88.14,53.09 180 top
SJ49  [PAD-JUMPER-3-NC_BY_PASTE_YES_SILK_FULL_BOX]  92.2,55.63 90 top
SJ50  SOLDERJUMPERNO  [SJ_2S-NO]  108.97,49.02 180 top
SJ51  SOLDERJUMPERNO  [SJ_2S-NO]  108.97,53.09 180 top
SJ52  [PAD-JUMPER-3-NC_BY_PASTE_YES_SILK_FULL_BOX]  113.03,55.63 90 top
SJ53  SOLDERJUMPERNO  [SJ_2S-NO]  129.79,49.02 180 top
SJ54  SOLDERJUMPERNO  [SJ_2S-NO]  129.79,53.09 180 top
SJ55  [PAD-JUMPER-3-NC_BY_PASTE_YES_SILK_FULL_BOX]  8.89,73.91 90 top
SJ56  SOLDERJUMPERNO  [SJ_2S-NO]  25.65,67.31 180 top
SJ57  SOLDERJUMPERNO  [SJ_2S-NO]  25.65,71.37 180 top
SJ58  [PAD-JUMPER-3-NC_BY_PASTE_YES_SILK_FULL_BOX]  29.72,73.91 90 top
SJ59  SOLDERJUMPERNO  [SJ_2S-NO]  46.48,67.31 180 top
SJ60  SOLDERJUMPERNO  [SJ_2S-NO]  46.48,71.37 180 top
SJ61  [PAD-JUMPER-3-NC_BY_PASTE_YES_SILK_FULL_BOX]  50.55,73.91 90 top
SJ62  SOLDERJUMPERNO  [SJ_2S-NO]  67.31,67.31 180 top
SJ63  SOLDERJUMPERNO  [SJ_2S-NO]  67.31,71.37 180 top
SJ64  [PAD-JUMPER-3-NC_BY_PASTE_YES_SILK_FULL_BOX]  71.37,73.91 90 top
SJ65  SOLDERJUMPERNO  [SJ_2S-NO]  88.14,67.31 180 top
SJ66  SOLDERJUMPERNO  [SJ_2S-NO]  88.14,71.37 180 top
SJ67  [PAD-JUMPER-3-NC_BY_PASTE_YES_SILK_FULL_BOX]  92.2,73.91 90 top
SJ68  SOLDERJUMPERNO  [SJ_2S-NO]  108.97,67.31 180 top
SJ69  SOLDERJUMPERNO  [SJ_2S-NO]  108.97,71.37 180 top
SJ70  [PAD-JUMPER-3-NC_BY_PASTE_YES_SILK_FULL_BOX]  113.03,73.91 90 top
SJ71  SOLDERJUMPERNO  [SJ_2S-NO]  129.79,67.31 180 top
SJ72  SOLDERJUMPERNO  [SJ_2S-NO]  129.79,71.37 180 top
SJ73  [PAD-JUMPER-3-NC_BY_PASTE_YES_SILK_FULL_BOX]  8.89,92.2 90 top
SJ74  SOLDERJUMPERNO  [SJ_2S-NO]  25.65,85.6 180 top
SJ75  SOLDERJUMPERNO  [SJ_2S-NO]  25.65,89.66 180 top
SJ76  [PAD-JUMPER-3-NC_BY_PASTE_YES_SILK_FULL_BOX]  29.72,92.2 90 top
SJ77  SOLDERJUMPERNO  [SJ_2S-NO]  46.48,85.6 180 top
SJ78  SOLDERJUMPERNO  [SJ_2S-NO]  46.48,89.66 180 top
SJ79  [PAD-JUMPER-3-NC_BY_PASTE_YES_SILK_FULL_BOX]  50.55,92.2 90 top
SJ80  SOLDERJUMPERNO  [SJ_2S-NO]  67.31,85.6 180 top
SJ81  SOLDERJUMPERNO  [SJ_2S-NO]  67.31,89.66 180 top
SJ82  [PAD-JUMPER-3-NC_BY_PASTE_YES_SILK_FULL_BOX]  71.37,92.2 90 top
SJ83  SOLDERJUMPERNO  [SJ_2S-NO]  88.14,85.6 180 top
SJ84  SOLDERJUMPERNO  [SJ_2S-NO]  88.14,89.66 180 top
SJ85  [PAD-JUMPER-3-NC_BY_PASTE_YES_SILK_FULL_BOX]  92.2,92.2 90 top
SJ86  SOLDERJUMPERNO  [SJ_2S-NO]  108.97,85.6 180 top
SJ87  SOLDERJUMPERNO  [SJ_2S-NO]  108.97,89.66 180 top
SJ88  [PAD-JUMPER-3-NC_BY_PASTE_YES_SILK_FULL_BOX]  113.03,92.2 90 top
SJ89  SOLDERJUMPERNO  [SJ_2S-NO]  129.79,85.6 180 top
SJ90  SOLDERJUMPERNO  [SJ_2S-NO]  129.79,89.66 180 top
SJ91  [PAD-JUMPER-3-NC_BY_PASTE_YES_SILK_FULL_BOX]  8.89,110.49 90 top
SJ92  SOLDERJUMPERNO  [SJ_2S-NO]  25.65,103.89 180 top
SJ93  SOLDERJUMPERNO  [SJ_2S-NO]  25.65,107.95 180 top
SJ94  [PAD-JUMPER-3-NC_BY_PASTE_YES_SILK_FULL_BOX]  29.72,110.49 90 top
SJ95  SOLDERJUMPERNO  [SJ_2S-NO]  46.48,103.89 180 top
SJ96  SOLDERJUMPERNO  [SJ_2S-NO]  46.48,107.95 180 top
SJ97  [PAD-JUMPER-3-NC_BY_PASTE_YES_SILK_FULL_BOX]  50.55,110.49 90 top
SJ98  SOLDERJUMPERNO  [SJ_2S-NO]  67.31,103.89 180 top
SJ99  SOLDERJUMPERNO  [SJ_2S-NO]  67.31,107.95 180 top
SJ100  [PAD-JUMPER-3-NC_BY_PASTE_YES_SILK_FULL_BOX]  71.37,110.49 90 top
SJ101  SOLDERJUMPERNO  [SJ_2S-NO]  88.14,103.89 180 top
SJ102  SOLDERJUMPERNO  [SJ_2S-NO]  88.14,107.95 180 top
SJ103  [PAD-JUMPER-3-NC_BY_PASTE_YES_SILK_FULL_BOX]  92.2,110.49 90 top
SJ104  SOLDERJUMPERNO  [SJ_2S-NO]  108.97,103.89 180 top
SJ105  SOLDERJUMPERNO  [SJ_2S-NO]  108.97,107.95 180 top
SJ106  [PAD-JUMPER-3-NC_BY_PASTE_YES_SILK_FULL_BOX]  113.03,110.49 90 top
SJ107  SOLDERJUMPERNO  [SJ_2S-NO]  129.79,103.89 180 top
SJ108  SOLDERJUMPERNO  [SJ_2S-NO]  129.79,107.95 180 top
STANDOFF1  STAND-OFFTIGHT  [STAND-OFF-TIGHT]  9.4,14.48 0 top
STANDOFF2  STAND-OFFTIGHT  [STAND-OFF-TIGHT]  24.64,22.1 0 top
STANDOFF3  STAND-OFFTIGHT  [STAND-OFF-TIGHT]  30.23,14.48 0 top
STANDOFF4  STAND-OFFTIGHT  [STAND-OFF-TIGHT]  45.47,22.1 0 top
STANDOFF5  STAND-OFFTIGHT  [STAND-OFF-TIGHT]  51.05,14.48 0 top
STANDOFF6  STAND-OFFTIGHT  [STAND-OFF-TIGHT]  66.29,22.1 0 top
STANDOFF7  STAND-OFFTIGHT  [STAND-OFF-TIGHT]  71.88,14.48 0 top
STANDOFF8  STAND-OFFTIGHT  [STAND-OFF-TIGHT]  87.12,22.1 0 top
STANDOFF9  STAND-OFFTIGHT  [STAND-OFF-TIGHT]  92.71,14.48 0 top
STANDOFF10  STAND-OFFTIGHT  [STAND-OFF-TIGHT]  107.95,22.1 0 top
STANDOFF11  STAND-OFFTIGHT  [STAND-OFF-TIGHT]  113.54,14.48 0 top
STANDOFF12  STAND-OFFTIGHT  [STAND-OFF-TIGHT]  128.78,22.1 0 top
STANDOFF13  STAND-OFFTIGHT  [STAND-OFF-TIGHT]  9.4,32.77 0 top
STANDOFF14  STAND-OFFTIGHT  [STAND-OFF-TIGHT]  24.64,40.39 0 top
STANDOFF15  STAND-OFFTIGHT  [STAND-OFF-TIGHT]  30.23,32.77 0 top
STANDOFF16  STAND-OFFTIGHT  [STAND-OFF-TIGHT]  45.47,40.39 0 top
STANDOFF17  STAND-OFFTIGHT  [STAND-OFF-TIGHT]  51.05,32.77 0 top
STANDOFF18  STAND-OFFTIGHT  [STAND-OFF-TIGHT]  66.29,40.39 0 top
STANDOFF19  STAND-OFFTIGHT  [STAND-OFF-TIGHT]  71.88,32.77 0 top
STANDOFF20  STAND-OFFTIGHT  [STAND-OFF-TIGHT]  87.12,40.39 0 top
STANDOFF21  STAND-OFFTIGHT  [STAND-OFF-TIGHT]  92.71,32.77 0 top
STANDOFF22  STAND-OFFTIGHT  [STAND-OFF-TIGHT]  107.95,40.39 0 top
STANDOFF23  STAND-OFFTIGHT  [STAND-OFF-TIGHT]  113.54,32.77 0 top
STANDOFF24  STAND-OFFTIGHT  [STAND-OFF-TIGHT]  128.78,40.39 0 top
STANDOFF25  STAND-OFFTIGHT  [STAND-OFF-TIGHT]  9.4,51.05 0 top
STANDOFF26  STAND-OFFTIGHT  [STAND-OFF-TIGHT]  24.64,58.67 0 top
STANDOFF27  STAND-OFFTIGHT  [STAND-OFF-TIGHT]  30.23,51.05 0 top
STANDOFF28  STAND-OFFTIGHT  [STAND-OFF-TIGHT]  45.47,58.67 0 top
STANDOFF29  STAND-OFFTIGHT  [STAND-OFF-TIGHT]  51.05,51.05 0 top
STANDOFF30  STAND-OFFTIGHT  [STAND-OFF-TIGHT]  66.29,58.67 0 top
STANDOFF31  STAND-OFFTIGHT  [STAND-OFF-TIGHT]  71.88,51.05 0 top
STANDOFF32  STAND-OFFTIGHT  [STAND-OFF-TIGHT]  87.12,58.67 0 top
STANDOFF33  STAND-OFFTIGHT  [STAND-OFF-TIGHT]  92.71,51.05 0 top
STANDOFF34  STAND-OFFTIGHT  [STAND-OFF-TIGHT]  107.95,58.67 0 top
STANDOFF35  STAND-OFFTIGHT  [STAND-OFF-TIGHT]  113.54,51.05 0 top
STANDOFF36  STAND-OFFTIGHT  [STAND-OFF-TIGHT]  128.78,58.67 0 top
STANDOFF37  STAND-OFFTIGHT  [STAND-OFF-TIGHT]  9.4,69.34 0 top
STANDOFF38  STAND-OFFTIGHT  [STAND-OFF-TIGHT]  24.64,76.96 0 top
STANDOFF39  STAND-OFFTIGHT  [STAND-OFF-TIGHT]  30.23,69.34 0 top
STANDOFF40  STAND-OFFTIGHT  [STAND-OFF-TIGHT]  45.47,76.96 0 top
STANDOFF41  STAND-OFFTIGHT  [STAND-OFF-TIGHT]  51.05,69.34 0 top
STANDOFF42  STAND-OFFTIGHT  [STAND-OFF-TIGHT]  66.29,76.96 0 top
STANDOFF43  STAND-OFFTIGHT  [STAND-OFF-TIGHT]  71.88,69.34 0 top
STANDOFF44  STAND-OFFTIGHT  [STAND-OFF-TIGHT]  87.12,76.96 0 top
STANDOFF45  STAND-OFFTIGHT  [STAND-OFF-TIGHT]  92.71,69.34 0 top
STANDOFF46  STAND-OFFTIGHT  [STAND-OFF-TIGHT]  107.95,76.96 0 top
STANDOFF47  STAND-OFFTIGHT  [STAND-OFF-TIGHT]  113.54,69.34 0 top
STANDOFF48  STAND-OFFTIGHT  [STAND-OFF-TIGHT]  128.78,76.96 0 top
STANDOFF49  STAND-OFFTIGHT  [STAND-OFF-TIGHT]  9.4,87.63 0 top
STANDOFF50  STAND-OFFTIGHT  [STAND-OFF-TIGHT]  24.64,95.25 0 top
STANDOFF51  STAND-OFFTIGHT  [STAND-OFF-TIGHT]  30.23,87.63 0 top
STANDOFF52  STAND-OFFTIGHT  [STAND-OFF-TIGHT]  45.47,95.25 0 top
STANDOFF53  STAND-OFFTIGHT  [STAND-OFF-TIGHT]  51.05,87.63 0 top
STANDOFF54  STAND-OFFTIGHT  [STAND-OFF-TIGHT]  66.29,95.25 0 top
STANDOFF55  STAND-OFFTIGHT  [STAND-OFF-TIGHT]  71.88,87.63 0 top
STANDOFF56  STAND-OFFTIGHT  [STAND-OFF-TIGHT]  87.12,95.25 0 top
STANDOFF57  STAND-OFFTIGHT  [STAND-OFF-TIGHT]  92.71,87.63 0 top
STANDOFF58  STAND-OFFTIGHT  [STAND-OFF-TIGHT]  107.95,95.25 0 top
STANDOFF59  STAND-OFFTIGHT  [STAND-OFF-TIGHT]  113.54,87.63 0 top
STANDOFF60  STAND-OFFTIGHT  [STAND-OFF-TIGHT]  128.78,95.25 0 top
STANDOFF61  STAND-OFFTIGHT  [STAND-OFF-TIGHT]  9.4,105.92 0 top
STANDOFF62  STAND-OFFTIGHT  [STAND-OFF-TIGHT]  24.64,113.54 0 top
STANDOFF63  STAND-OFFTIGHT  [STAND-OFF-TIGHT]  30.23,105.92 0 top
STANDOFF64  STAND-OFFTIGHT  [STAND-OFF-TIGHT]  45.47,113.54 0 top
STANDOFF65  STAND-OFFTIGHT  [STAND-OFF-TIGHT]  51.05,105.92 0 top
STANDOFF66  STAND-OFFTIGHT  [STAND-OFF-TIGHT]  66.29,113.54 0 top
STANDOFF67  STAND-OFFTIGHT  [STAND-OFF-TIGHT]  71.88,105.92 0 top
STANDOFF68  STAND-OFFTIGHT  [STAND-OFF-TIGHT]  87.12,113.54 0 top
STANDOFF69  STAND-OFFTIGHT  [STAND-OFF-TIGHT]  92.71,105.92 0 top
STANDOFF70  STAND-OFFTIGHT  [STAND-OFF-TIGHT]  107.95,113.54 0 top
STANDOFF71  STAND-OFFTIGHT  [STAND-OFF-TIGHT]  113.54,105.92 0 top
STANDOFF72  STAND-OFFTIGHT  [STAND-OFF-TIGHT]  128.78,113.54 0 top
U1  MS5803-14BA  [MS5803]  17.02,18.29 270 top
U2  MS5803-14BA  [MS5803]  37.85,18.29 270 top
U3  MS5803-14BA  [MS5803]  58.67,18.29 270 top
U4  MS5803-14BA  [MS5803]  79.5,18.29 270 top
U5  MS5803-14BA  [MS5803]  100.33,18.29 270 top
U6  MS5803-14BA  [MS5803]  121.16,18.29 270 top
U7  MS5803-14BA  [MS5803]  17.02,36.58 270 top
U8  MS5803-14BA  [MS5803]  37.85,36.58 270 top
U9  MS5803-14BA  [MS5803]  58.67,36.58 270 top
U10  MS5803-14BA  [MS5803]  79.5,36.58 270 top
U11  MS5803-14BA  [MS5803]  100.33,36.58 270 top
U12  MS5803-14BA  [MS5803]  121.16,36.58 270 top
U13  MS5803-14BA  [MS5803]  17.02,54.86 270 top
U14  MS5803-14BA  [MS5803]  37.85,54.86 270 top
U15  MS5803-14BA  [MS5803]  58.67,54.86 270 top
U16  MS5803-14BA  [MS5803]  79.5,54.86 270 top
U17  MS5803-14BA  [MS5803]  100.33,54.86 270 top
U18  MS5803-14BA  [MS5803]  121.16,54.86 270 top
U19  MS5803-14BA  [MS5803]  17.02,73.15 270 top
U20  MS5803-14BA  [MS5803]  37.85,73.15 270 top
U21  MS5803-14BA  [MS5803]  58.67,73.15 270 top
U22  MS5803-14BA  [MS5803]  79.5,73.15 270 top
U23  MS5803-14BA  [MS5803]  100.33,73.15 270 top
U24  MS5803-14BA  [MS5803]  121.16,73.15 270 top
U25  MS5803-14BA  [MS5803]  17.02,91.44 270 top
U26  MS5803-14BA  [MS5803]  37.85,91.44 270 top
U27  MS5803-14BA  [MS5803]  58.67,91.44 270 top
U28  MS5803-14BA  [MS5803]  79.5,91.44 270 top
U29  MS5803-14BA  [MS5803]  100.33,91.44 270 top
U30  MS5803-14BA  [MS5803]  121.16,91.44 270 top
U31  MS5803-14BA  [MS5803]  17.02,109.73 270 top
U32  MS5803-14BA  [MS5803]  37.85,109.73 270 top
U33  MS5803-14BA  [MS5803]  58.67,109.73 270 top
U34  MS5803-14BA  [MS5803]  79.5,109.73 270 top
U35  MS5803-14BA  [MS5803]  100.33,109.73 270 top
U36  MS5803-14BA  [MS5803]  121.16,109.73 270 top

## Library data of the parts
C1-C36 = SparkFun-Capacitors; PROD_ID: CAP-00810
E$1 = SparkFun-Retired
E$4 E$6 FID1-FID72 LOGO1-LOGO108 = SparkFun-Aesthetics
JP1-JP36 = SparkFun-Connectors
R1 R2 R5 R6 R9 R10 R13 R14 R17 R18 R21 R22 R25 R26 R29 R30 R33 R34 R37 R38 R41 R42 R45 R46 R49 R50 R53 R54 R57 R58 R61 R62 R65 R66 R69 R70 R73 R74 R77 R78 R81 R82 R85 R86 R89 R90 R93 R94 R97 R98 R101 R102 R105 R106 R109 R110 R113 R114 R117 R118 R121 R122 R125 R126 R129 R130 R133 R134 R137 R138 R141 R142 = SparkFun-Resistors; PROD_ID: RES-08272
R3 R4 R7 R8 R11 R12 R15 R16 R19 R20 R23 R24 R27 R28 R31 R32 R35 R36 R39 R40 R43 R44 R47 R48 R51 R52 R55 R56 R59 R60 R63 R64 R67 R68 R71 R72 R75 R76 R79 R80 R83 R84 R87 R88 R91 R92 R95 R96 R99 R100 R103 R104 R107 R108 R111 R112 R115 R116 R119 R120 R123 R124 R127 R128 R131 R132 R135 R136 R139 R140 R143 R144 = SparkFun-Resistors; PROD_ID: RES-00824
SJ1-SJ108 = SparkFun-Passives
STANDOFF1-STANDOFF72 = SparkFun-Electromechanical
U1-U36 = MS5803; PROD_ID: IC-12111

## Nets
3.3V: C1.1 JP1.2 R3.2 R4.2 SJ1.2 U1.5
3.3V1: C2.1 JP2.2 R7.2 R8.2 SJ4.2 U2.5
3.3V2: C3.1 JP3.2 R11.2 R12.2 SJ7.2 U3.5
3.3V3: C4.1 JP4.2 R15.2 R16.2 SJ10.2 U4.5
3.3V4: C5.1 JP5.2 R19.2 R20.2 SJ13.2 U5.5
3.3V5: C6.1 JP6.2 R23.2 R24.2 SJ16.2 U6.5
3.3V6: C7.1 JP7.2 R27.2 R28.2 SJ19.2 U7.5
3.3V7: C8.1 JP8.2 R31.2 R32.2 SJ22.2 U8.5
3.3V8: C9.1 JP9.2 R35.2 R36.2 SJ25.2 U9.5
3.3V9: C10.1 JP10.2 R39.2 R40.2 SJ28.2 U10.5
3.3V10: C11.1 JP11.2 R43.2 R44.2 SJ31.2 U11.5
3.3V11: C12.1 JP12.2 R47.2 R48.2 SJ34.2 U12.5
3.3V12: C13.1 JP13.2 R51.2 R52.2 SJ37.2 U13.5
3.3V13: C14.1 JP14.2 R55.2 R56.2 SJ40.2 U14.5
3.3V14: C15.1 JP15.2 R59.2 R60.2 SJ43.2 U15.5
3.3V15: C16.1 JP16.2 R63.2 R64.2 SJ46.2 U16.5
3.3V16: C17.1 JP17.2 R67.2 R68.2 SJ49.2 U17.5
3.3V17: C18.1 JP18.2 R71.2 R72.2 SJ52.2 U18.5
3.3V18: C19.1 JP19.2 R75.2 R76.2 SJ55.2 U19.5
3.3V19: C20.1 JP20.2 R79.2 R80.2 SJ58.2 U20.5
3.3V20: C21.1 JP21.2 R83.2 R84.2 SJ61.2 U21.5
3.3V21: C22.1 JP22.2 R87.2 R88.2 SJ64.2 U22.5
3.3V22: C23.1 JP23.2 R91.2 R92.2 SJ67.2 U23.5
3.3V23: C24.1 JP24.2 R95.2 R96.2 SJ70.2 U24.5
3.3V24: C25.1 JP25.2 R99.2 R100.2 SJ73.2 U25.5
3.3V25: C26.1 JP26.2 R103.2 R104.2 SJ76.2 U26.5
3.3V26: C27.1 JP27.2 R107.2 R108.2 SJ79.2 U27.5
3.3V27: C28.1 JP28.2 R111.2 R112.2 SJ82.2 U28.5
3.3V28: C29.1 JP29.2 R115.2 R116.2 SJ85.2 U29.5
3.3V29: C30.1 JP30.2 R119.2 R120.2 SJ88.2 U30.5
3.3V30: C31.1 JP31.2 R123.2 R124.2 SJ91.2 U31.5
3.3V31: C32.1 JP32.2 R127.2 R128.2 SJ94.2 U32.5
3.3V32: C33.1 JP33.2 R131.2 R132.2 SJ97.2 U33.5
3.3V33: C34.1 JP34.2 R135.2 R136.2 SJ100.2 U34.5
3.3V34: C35.1 JP35.2 R139.2 R140.2 SJ103.2 U35.5
3.3V35: C36.1 JP36.2 R143.2 R144.2 SJ106.2 U36.5
AD/CS: JP1.6 R4.1 SJ2.2 U1.3
AD/CS1: JP2.6 R8.1 SJ6.2 U2.3
AD/CS2: JP3.6 R12.1 SJ9.2 U3.3
AD/CS3: JP4.6 R16.1 SJ12.2 U4.3
AD/CS4: JP5.6 R20.1 SJ15.2 U5.3
AD/CS5: JP6.6 R24.1 SJ18.2 U6.3
AD/CS6: JP7.6 R28.1 SJ21.2 U7.3
AD/CS7: JP8.6 R32.1 SJ24.2 U8.3
AD/CS8: JP9.6 R36.1 SJ27.2 U9.3
AD/CS9: JP10.6 R40.1 SJ30.2 U10.3
AD/CS10: JP11.6 R44.1 SJ33.2 U11.3
AD/CS11: JP12.6 R48.1 SJ36.2 U12.3
AD/CS12: JP13.6 R52.1 SJ39.2 U13.3
AD/CS13: JP14.6 R56.1 SJ42.2 U14.3
AD/CS14: JP15.6 R60.1 SJ45.2 U15.3
AD/CS15: JP16.6 R64.1 SJ48.2 U16.3
AD/CS16: JP17.6 R68.1 SJ51.2 U17.3
AD/CS17: JP18.6 R72.1 SJ54.2 U18.3
AD/CS18: JP19.6 R76.1 SJ57.2 U19.3
AD/CS19: JP20.6 R80.1 SJ60.2 U20.3
AD/CS20: JP21.6 R84.1 SJ63.2 U21.3
AD/CS21: JP22.6 R88.1 SJ66.2 U22.3
AD/CS22: JP23.6 R92.1 SJ69.2 U23.3
AD/CS23: JP24.6 R96.1 SJ72.2 U24.3
AD/CS24: JP25.6 R100.1 SJ75.2 U25.3
AD/CS25: JP26.6 R104.1 SJ78.2 U26.3
AD/CS26: JP27.6 R108.1 SJ81.2 U27.3
AD/CS27: JP28.6 R112.1 SJ84.2 U28.3
AD/CS28: JP29.6 R116.1 SJ87.2 U29.3
AD/CS29: JP30.6 R120.1 SJ90.2 U30.3
AD/CS30: JP31.6 R124.1 SJ93.2 U31.3
AD/CS31: JP32.6 R128.1 SJ96.2 U32.3
AD/CS32: JP33.6 R132.1 SJ99.2 U33.3
AD/CS33: JP34.6 R136.1 SJ102.2 U34.3
AD/CS34: JP35.6 R140.1 SJ105.2 U35.3
AD/CS35: JP36.6 R144.1 SJ108.2 U36.3
GND: C1.2 JP1.1 SJ2.1 SJ3.1 U1.2
GND1: C2.2 JP2.1 SJ5.1 SJ6.1 U2.2
GND2: C3.2 JP3.1 SJ8.1 SJ9.1 U3.2
GND3: C4.2 JP4.1 SJ11.1 SJ12.1 U4.2
GND4: C5.2 JP5.1 SJ14.1 SJ15.1 U5.2
GND5: C6.2 JP6.1 SJ17.1 SJ18.1 U6.2
GND6: C7.2 JP7.1 SJ20.1 SJ21.1 U7.2
GND7: C8.2 JP8.1 SJ23.1 SJ24.1 U8.2
GND8: C9.2 JP9.1 SJ26.1 SJ27.1 U9.2
GND9: C10.2 JP10.1 SJ29.1 SJ30.1 U10.2
GND10: C11.2 JP11.1 SJ32.1 SJ33.1 U11.2
GND11: C12.2 JP12.1 SJ35.1 SJ36.1 U12.2
GND12: C13.2 JP13.1 SJ38.1 SJ39.1 U13.2
GND13: C14.2 JP14.1 SJ41.1 SJ42.1 U14.2
GND14: C15.2 JP15.1 SJ44.1 SJ45.1 U15.2
GND15: C16.2 JP16.1 SJ47.1 SJ48.1 U16.2
GND16: C17.2 JP17.1 SJ50.1 SJ51.1 U17.2
GND17: C18.2 JP18.1 SJ53.1 SJ54.1 U18.2
GND18: C19.2 JP19.1 SJ56.1 SJ57.1 U19.2
GND19: C20.2 JP20.1 SJ59.1 SJ60.1 U20.2
GND20: C21.2 JP21.1 SJ62.1 SJ63.1 U21.2
GND21: C22.2 JP22.1 SJ65.1 SJ66.1 U22.2
GND22: C23.2 JP23.1 SJ68.1 SJ69.1 U23.2
GND23: C24.2 JP24.1 SJ71.1 SJ72.1 U24.2
GND24: C25.2 JP25.1 SJ74.1 SJ75.1 U25.2
GND25: C26.2 JP26.1 SJ77.1 SJ78.1 U26.2
GND26: C27.2 JP27.1 SJ80.1 SJ81.1 U27.2
GND27: C28.2 JP28.1 SJ83.1 SJ84.1 U28.2
GND28: C29.2 JP29.1 SJ86.1 SJ87.1 U29.2
GND29: C30.2 JP30.1 SJ89.1 SJ90.1 U30.2
GND30: C31.2 JP31.1 SJ92.1 SJ93.1 U31.2
GND31: C32.2 JP32.1 SJ95.1 SJ96.1 U32.2
GND32: C33.2 JP33.1 SJ98.1 SJ99.1 U33.2
GND33: C34.2 JP34.1 SJ101.1 SJ102.1 U34.2
GND34: C35.2 JP35.1 SJ104.1 SJ105.1 U35.2
GND35: C36.2 JP36.1 SJ107.1 SJ108.1 U36.2
N$1: R1.2 SJ1.3
N$2: R2.2 SJ1.1
N$3: R5.2 SJ4.3
N$4: R6.2 SJ4.1
N$5: R9.2 SJ7.3
N$6: R10.2 SJ7.1
N$7: R13.2 SJ10.3
N$8: R14.2 SJ10.1
N$9: R17.2 SJ13.3
N$10: R18.2 SJ13.1
N$11: R21.2 SJ16.3
N$12: R22.2 SJ16.1
N$13: R25.2 SJ19.3
N$14: R26.2 SJ19.1
N$15: R29.2 SJ22.3
N$16: R30.2 SJ22.1
N$17: R33.2 SJ25.3
N$18: R34.2 SJ25.1
N$19: R37.2 SJ28.3
N$20: R38.2 SJ28.1
N$21: R41.2 SJ31.3
N$22: R42.2 SJ31.1
N$23: R45.2 SJ34.3
N$24: R46.2 SJ34.1
N$25: R49.2 SJ37.3
N$26: R50.2 SJ37.1
N$27: R53.2 SJ40.3
N$28: R54.2 SJ40.1
N$29: R57.2 SJ43.3
N$30: R58.2 SJ43.1
N$31: R61.2 SJ46.3
N$32: R62.2 SJ46.1
N$33: R65.2 SJ49.3
N$34: R66.2 SJ49.1
N$35: R69.2 SJ52.3
N$36: R70.2 SJ52.1
N$37: R73.2 SJ55.3
N$38: R74.2 SJ55.1
N$39: R77.2 SJ58.3
N$40: R78.2 SJ58.1
N$41: R81.2 SJ61.3
N$42: R82.2 SJ61.1
N$43: R85.2 SJ64.3
N$44: R86.2 SJ64.1
N$45: R89.2 SJ67.3
N$46: R90.2 SJ67.1
N$47: R93.2 SJ70.3
N$48: R94.2 SJ70.1
N$49: R97.2 SJ73.3
N$50: R98.2 SJ73.1
N$51: R101.2 SJ76.3
N$52: R102.2 SJ76.1
N$53: R105.2 SJ79.3
N$54: R106.2 SJ79.1
N$55: R109.2 SJ82.3
N$56: R110.2 SJ82.1
N$57: R113.2 SJ85.3
N$58: R114.2 SJ85.1
N$59: R117.2 SJ88.3
N$60: R118.2 SJ88.1
N$61: R121.2 SJ91.3
N$62: R122.2 SJ91.1
N$63: R125.2 SJ94.3
N$64: R126.2 SJ94.1
N$65: R129.2 SJ97.3
N$66: R130.2 SJ97.1
N$67: R133.2 SJ100.3
N$68: R134.2 SJ100.1
N$69: R137.2 SJ103.3
N$70: R138.2 SJ103.1
N$71: R141.2 SJ106.3
N$72: R142.2 SJ106.1
PS: JP1.7 R3.1 SJ3.2 U1.6
PS1: JP2.7 R7.1 SJ5.2 U2.6
PS2: JP3.7 R11.1 SJ8.2 U3.6
PS3: JP4.7 R15.1 SJ11.2 U4.6
PS4: JP5.7 R19.1 SJ14.2 U5.6
PS5: JP6.7 R23.1 SJ17.2 U6.6
PS6: JP7.7 R27.1 SJ20.2 U7.6
PS7: JP8.7 R31.1 SJ23.2 U8.6
PS8: JP9.7 R35.1 SJ26.2 U9.6
PS9: JP10.7 R39.1 SJ29.2 U10.6
PS10: JP11.7 R43.1 SJ32.2 U11.6
PS11: JP12.7 R47.1 SJ35.2 U12.6
PS12: JP13.7 R51.1 SJ38.2 U13.6
PS13: JP14.7 R55.1 SJ41.2 U14.6
PS14: JP15.7 R59.1 SJ44.2 U15.6
PS15: JP16.7 R63.1 SJ47.2 U16.6
PS16: JP17.7 R67.1 SJ50.2 U17.6
PS17: JP18.7 R71.1 SJ53.2 U18.6
PS18: JP19.7 R75.1 SJ56.2 U19.6
PS19: JP20.7 R79.1 SJ59.2 U20.6
PS20: JP21.7 R83.1 SJ62.2 U21.6
PS21: JP22.7 R87.1 SJ65.2 U22.6
PS22: JP23.7 R91.1 SJ68.2 U23.6
PS23: JP24.7 R95.1 SJ71.2 U24.6
PS24: JP25.7 R99.1 SJ74.2 U25.6
PS25: JP26.7 R103.1 SJ77.2 U26.6
PS26: JP27.7 R107.1 SJ80.2 U27.6
PS27: JP28.7 R111.1 SJ83.2 U28.6
PS28: JP29.7 R115.1 SJ86.2 U29.6
PS29: JP30.7 R119.1 SJ89.2 U30.6
PS30: JP31.7 R123.1 SJ92.2 U31.6
PS31: JP32.7 R127.1 SJ95.2 U32.6
PS32: JP33.7 R131.1 SJ98.2 U33.6
PS33: JP34.7 R135.1 SJ101.2 U34.6
PS34: JP35.7 R139.1 SJ104.2 U35.6
PS35: JP36.7 R143.1 SJ107.2 U36.6
SCL/SCLK: JP1.4 R1.1 U1.1
SCL/SCLK1: JP2.4 R5.1 U2.1
SCL/SCLK2: JP3.4 R9.1 U3.1
SCL/SCLK3: JP4.4 R13.1 U4.1
SCL/SCLK4: JP5.4 R17.1 U5.1
SCL/SCLK5: JP6.4 R21.1 U6.1
SCL/SCLK6: JP7.4 R25.1 U7.1
SCL/SCLK7: JP8.4 R29.1 U8.1
SCL/SCLK8: JP9.4 R33.1 U9.1
SCL/SCLK9: JP10.4 R37.1 U10.1
SCL/SCLK10: JP11.4 R41.1 U11.1
SCL/SCLK11: JP12.4 R45.1 U12.1
SCL/SCLK12: JP13.4 R49.1 U13.1
SCL/SCLK13: JP14.4 R53.1 U14.1
SCL/SCLK14: JP15.4 R57.1 U15.1
SCL/SCLK15: JP16.4 R61.1 U16.1
SCL/SCLK16: JP17.4 R65.1 U17.1
SCL/SCLK17: JP18.4 R69.1 U18.1
SCL/SCLK18: JP19.4 R73.1 U19.1
SCL/SCLK19: JP20.4 R77.1 U20.1
SCL/SCLK20: JP21.4 R81.1 U21.1
SCL/SCLK21: JP22.4 R85.1 U22.1
SCL/SCLK22: JP23.4 R89.1 U23.1
SCL/SCLK23: JP24.4 R93.1 U24.1
SCL/SCLK24: JP25.4 R97.1 U25.1
SCL/SCLK25: JP26.4 R101.1 U26.1
SCL/SCLK26: JP27.4 R105.1 U27.1
SCL/SCLK27: JP28.4 R109.1 U28.1
SCL/SCLK28: JP29.4 R113.1 U29.1
SCL/SCLK29: JP30.4 R117.1 U30.1
SCL/SCLK30: JP31.4 R121.1 U31.1
SCL/SCLK31: JP32.4 R125.1 U32.1
SCL/SCLK32: JP33.4 R129.1 U33.1
SCL/SCLK33: JP34.4 R133.1 U34.1
SCL/SCLK34: JP35.4 R137.1 U35.1
SCL/SCLK35: JP36.4 R141.1 U36.1
SDA/SDI: JP1.3 R2.1 U1.7
SDA/SDI1: JP2.3 R6.1 U2.7
SDA/SDI2: JP3.3 R10.1 U3.7
SDA/SDI3: JP4.3 R14.1 U4.7
SDA/SDI4: JP5.3 R18.1 U5.7
SDA/SDI5: JP6.3 R22.1 U6.7
SDA/SDI6: JP7.3 R26.1 U7.7
SDA/SDI7: JP8.3 R30.1 U8.7
SDA/SDI8: JP9.3 R34.1 U9.7
SDA/SDI9: JP10.3 R38.1 U10.7
SDA/SDI10: JP11.3 R42.1 U11.7
SDA/SDI11: JP12.3 R46.1 U12.7
SDA/SDI12: JP13.3 R50.1 U13.7
SDA/SDI13: JP14.3 R54.1 U14.7
SDA/SDI14: JP15.3 R58.1 U15.7
SDA/SDI15: JP16.3 R62.1 U16.7
SDA/SDI16: JP17.3 R66.1 U17.7
SDA/SDI17: JP18.3 R70.1 U18.7
SDA/SDI18: JP19.3 R74.1 U19.7
SDA/SDI19: JP20.3 R78.1 U20.7
SDA/SDI20: JP21.3 R82.1 U21.7
SDA/SDI21: JP22.3 R86.1 U22.7
SDA/SDI22: JP23.3 R90.1 U23.7
SDA/SDI23: JP24.3 R94.1 U24.7
SDA/SDI24: JP25.3 R98.1 U25.7
SDA/SDI25: JP26.3 R102.1 U26.7
SDA/SDI26: JP27.3 R106.1 U27.7
SDA/SDI27: JP28.3 R110.1 U28.7
SDA/SDI28: JP29.3 R114.1 U29.7
SDA/SDI29: JP30.3 R118.1 U30.7
SDA/SDI30: JP31.3 R122.1 U31.7
SDA/SDI31: JP32.3 R126.1 U32.7
SDA/SDI32: JP33.3 R130.1 U33.7
SDA/SDI33: JP34.3 R134.1 U34.7
SDA/SDI34: JP35.3 R138.1 U35.7
SDA/SDI35: JP36.3 R142.1 U36.7
SDO: JP1.5 U1.8
SDO1: JP2.5 U2.8
SDO2: JP3.5 U3.8
SDO3: JP4.5 U4.8
SDO4: JP5.5 U5.8
SDO5: JP6.5 U6.8
SDO6: JP7.5 U7.8
SDO7: JP8.5 U8.8
SDO8: JP9.5 U9.8
SDO9: JP10.5 U10.8
SDO10: JP11.5 U11.8
SDO11: JP12.5 U12.8
SDO12: JP13.5 U13.8
SDO13: JP14.5 U14.8
SDO14: JP15.5 U15.8
SDO15: JP16.5 U16.8
SDO16: JP17.5 U17.8
SDO17: JP18.5 U18.8
SDO18: JP19.5 U19.8
SDO19: JP20.5 U20.8
SDO20: JP21.5 U21.8
SDO21: JP22.5 U22.8
SDO22: JP23.5 U23.8
SDO23: JP24.5 U24.8
SDO24: JP25.5 U25.8
SDO25: JP26.5 U26.8
SDO26: JP27.5 U27.8
SDO27: JP28.5 U28.8
SDO28: JP29.5 U29.8
SDO29: JP30.5 U30.8
SDO30: JP31.5 U31.8
SDO31: JP32.5 U32.8
SDO32: JP33.5 U33.8
SDO33: JP34.5 U34.8
SDO34: JP35.5 U35.8
SDO35: JP36.5 U36.8

## Tracks (layer width: path | path; a pad name or v marks a point on that pad's centre or on a via)
3.3V  (via drill 0.51)
  Top 0.254: SJ1.2 7.87,19.05 7.62,18.8 7.62,17.53 8.13,17.02 13.71,17.02 U1.5 | R4.2 v20.32,16.51 | 21.76,12.36 R3.2 21.76,11.34 v20.57,10.16
  Top 0.406: U1.5 15.12,13.25 C1.1 15.07,12.53 11.94,9.4 JP1.2
  Bottom 0.254: JP1.2 13.46,9.65 20.07,9.65 v20.57,10.16 21.34,10.92 21.34,15.49 v20.32,16.51
3.3V1  (via drill 0.51)
  Top 0.254: SJ4.2 28.7,19.05 28.45,18.8 28.45,17.53 28.96,17.02 34.54,17.02 U2.5 | R8.2 v41.15,16.51 | 42.58,12.36 R7.2 42.58,11.34 v41.4,10.16
  Top 0.406: U2.5 35.95,13.25 C2.1 35.9,12.53 32.77,9.4 JP2.2
  Bottom 0.254: JP2.2 34.29,9.65 40.89,9.65 v41.4,10.16 42.16,10.92 42.16,15.49 v41.15,16.51
3.3V2  (via drill 0.51)
  Top 0.254: SJ7.2 49.53,19.05 49.28,18.8 49.28,17.53 49.78,17.02 55.37,17.02 U3.5 | R12.2 v61.98,16.51 | 63.41,12.36 R11.2 63.41,11.34 v62.23,10.16
  Top 0.406: U3.5 56.77,13.25 C3.1 56.73,12.53 53.59,9.4 JP3.2
  Bottom 0.254: JP3.2 55.12,9.65 61.72,9.65 v62.23,10.16 62.99,10.92 62.99,15.49 v61.98,16.51
3.3V3  (via drill 0.51)
  Top 0.254: SJ10.2 70.36,19.05 70.1,18.8 70.1,17.53 70.61,17.02 76.2,17.02 U4.5 | R16.2 v82.8,16.51 | 84.24,12.36 R15.2 84.24,11.34 v83.06,10.16
  Top 0.406: U4.5 77.6,13.25 C4.1 77.56,12.53 74.42,9.4 JP4.2
  Bottom 0.254: JP4.2 75.95,9.65 82.55,9.65 v83.06,10.16 83.82,10.92 83.82,15.49 v82.8,16.51
3.3V4  (via drill 0.51)
  Top 0.254: SJ13.2 91.19,19.05 90.93,18.8 90.93,17.53 91.44,17.02 97.03,17.02 U5.5 | R20.2 v103.63,16.51 | 105.07,12.36 R19.2 105.07,11.34 v103.89,10.16
  Top 0.406: U5.5 98.43,13.25 C5.1 98.39,12.53 95.25,9.4 JP5.2
  Bottom 0.254: JP5.2 96.77,9.65 103.38,9.65 v103.89,10.16 104.65,10.92 104.65,15.49 v103.63,16.51
3.3V5  (via drill 0.51)
  Top 0.254: SJ16.2 112.01,19.05 111.76,18.8 111.76,17.53 112.27,17.02 117.85,17.02 U6.5 | R24.2 v124.46,16.51 | 125.9,12.36 R23.2 125.9,11.34 v124.71,10.16
  Top 0.406: U6.5 119.26,13.25 C6.1 119.21,12.53 116.08,9.4 JP6.2
  Bottom 0.254: JP6.2 117.6,9.65 124.21,9.65 v124.71,10.16 125.48,10.92 125.48,15.49 v124.46,16.51
3.3V6  (via drill 0.51)
  Top 0.254: SJ19.2 7.87,37.34 7.62,37.08 7.62,35.81 8.13,35.31 13.71,35.31 U7.5 | R28.2 v20.32,34.8 | 21.76,30.65 R27.2 21.76,29.63 v20.57,28.45
  Top 0.406: U7.5 15.12,31.54 C7.1 15.07,30.82 11.94,27.69 JP7.2
  Bottom 0.254: JP7.2 13.46,27.94 20.07,27.94 v20.57,28.45 21.34,29.21 21.34,33.78 v20.32,34.8
3.3V7  (via drill 0.51)
  Top 0.254: SJ22.2 28.7,37.34 28.45,37.08 28.45,35.81 28.96,35.31 34.54,35.31 U8.5 | R32.2 v41.15,34.8 | 42.58,30.65 R31.2 42.58,29.63 v41.4,28.45
  Top 0.406: U8.5 35.95,31.54 C8.1 35.9,30.82 32.77,27.69 JP8.2
  Bottom 0.254: JP8.2 34.29,27.94 40.89,27.94 v41.4,28.45 42.16,29.21 42.16,33.78 v41.15,34.8
3.3V8  (via drill 0.51)
  Top 0.254: SJ25.2 49.53,37.34 49.28,37.08 49.28,35.81 49.78,35.31 55.37,35.31 U9.5 | R36.2 v61.98,34.8 | 63.41,30.65 R35.2 63.41,29.63 v62.23,28.45
  Top 0.406: U9.5 56.77,31.54 C9.1 56.73,30.82 53.59,27.69 JP9.2
  Bottom 0.254: JP9.2 55.12,27.94 61.72,27.94 v62.23,28.45 62.99,29.21 62.99,33.78 v61.98,34.8
3.3V9  (via drill 0.51)
  Top 0.254: SJ28.2 70.36,37.34 70.1,37.08 70.1,35.81 70.61,35.31 76.2,35.31 U10.5 | R40.2 v82.8,34.8 | 84.24,30.65 R39.2 84.24,29.63 v83.06,28.45
  Top 0.406: U10.5 77.6,31.54 C10.1 77.56,30.82 74.42,27.69 JP10.2
  Bottom 0.254: JP10.2 75.95,27.94 82.55,27.94 v83.06,28.45 83.82,29.21 83.82,33.78 v82.8,34.8
3.3V10  (via drill 0.51)
  Top 0.254: SJ31.2 91.19,37.34 90.93,37.08 90.93,35.81 91.44,35.31 97.03,35.31 U11.5 | R44.2 v103.63,34.8 | 105.07,30.65 R43.2 105.07,29.63 v103.89,28.45
  Top 0.406: U11.5 98.43,31.54 C11.1 98.39,30.82 95.25,27.69 JP11.2
  Bottom 0.254: JP11.2 96.77,27.94 103.38,27.94 v103.89,28.45 104.65,29.21 104.65,33.78 v103.63,34.8
3.3V11  (via drill 0.51)
  Top 0.254: SJ34.2 112.01,37.34 111.76,37.08 111.76,35.81 112.27,35.31 117.85,35.31 U12.5 | R48.2 v124.46,34.8 | 125.9,30.65 R47.2 125.9,29.63 v124.71,28.45
  Top 0.406: U12.5 119.26,31.54 C12.1 119.21,30.82 116.08,27.69 JP12.2
  Bottom 0.254: JP12.2 117.6,27.94 124.21,27.94 v124.71,28.45 125.48,29.21 125.48,33.78 v124.46,34.8
3.3V12  (via drill 0.51)
  Top 0.254: SJ37.2 7.87,55.63 7.62,55.37 7.62,54.1 8.13,53.59 13.71,53.59 U13.5 | R52.2 v20.32,53.09 | 21.76,48.93 R51.2 21.76,47.92 v20.57,46.74
  Top 0.406: U13.5 15.12,49.83 C13.1 15.07,49.11 11.94,45.97 JP13.2